# EAGLE board SparkFun_Servo_Trigger_Panel_v10 (EAGLE 6.6.0), part 1 of 3
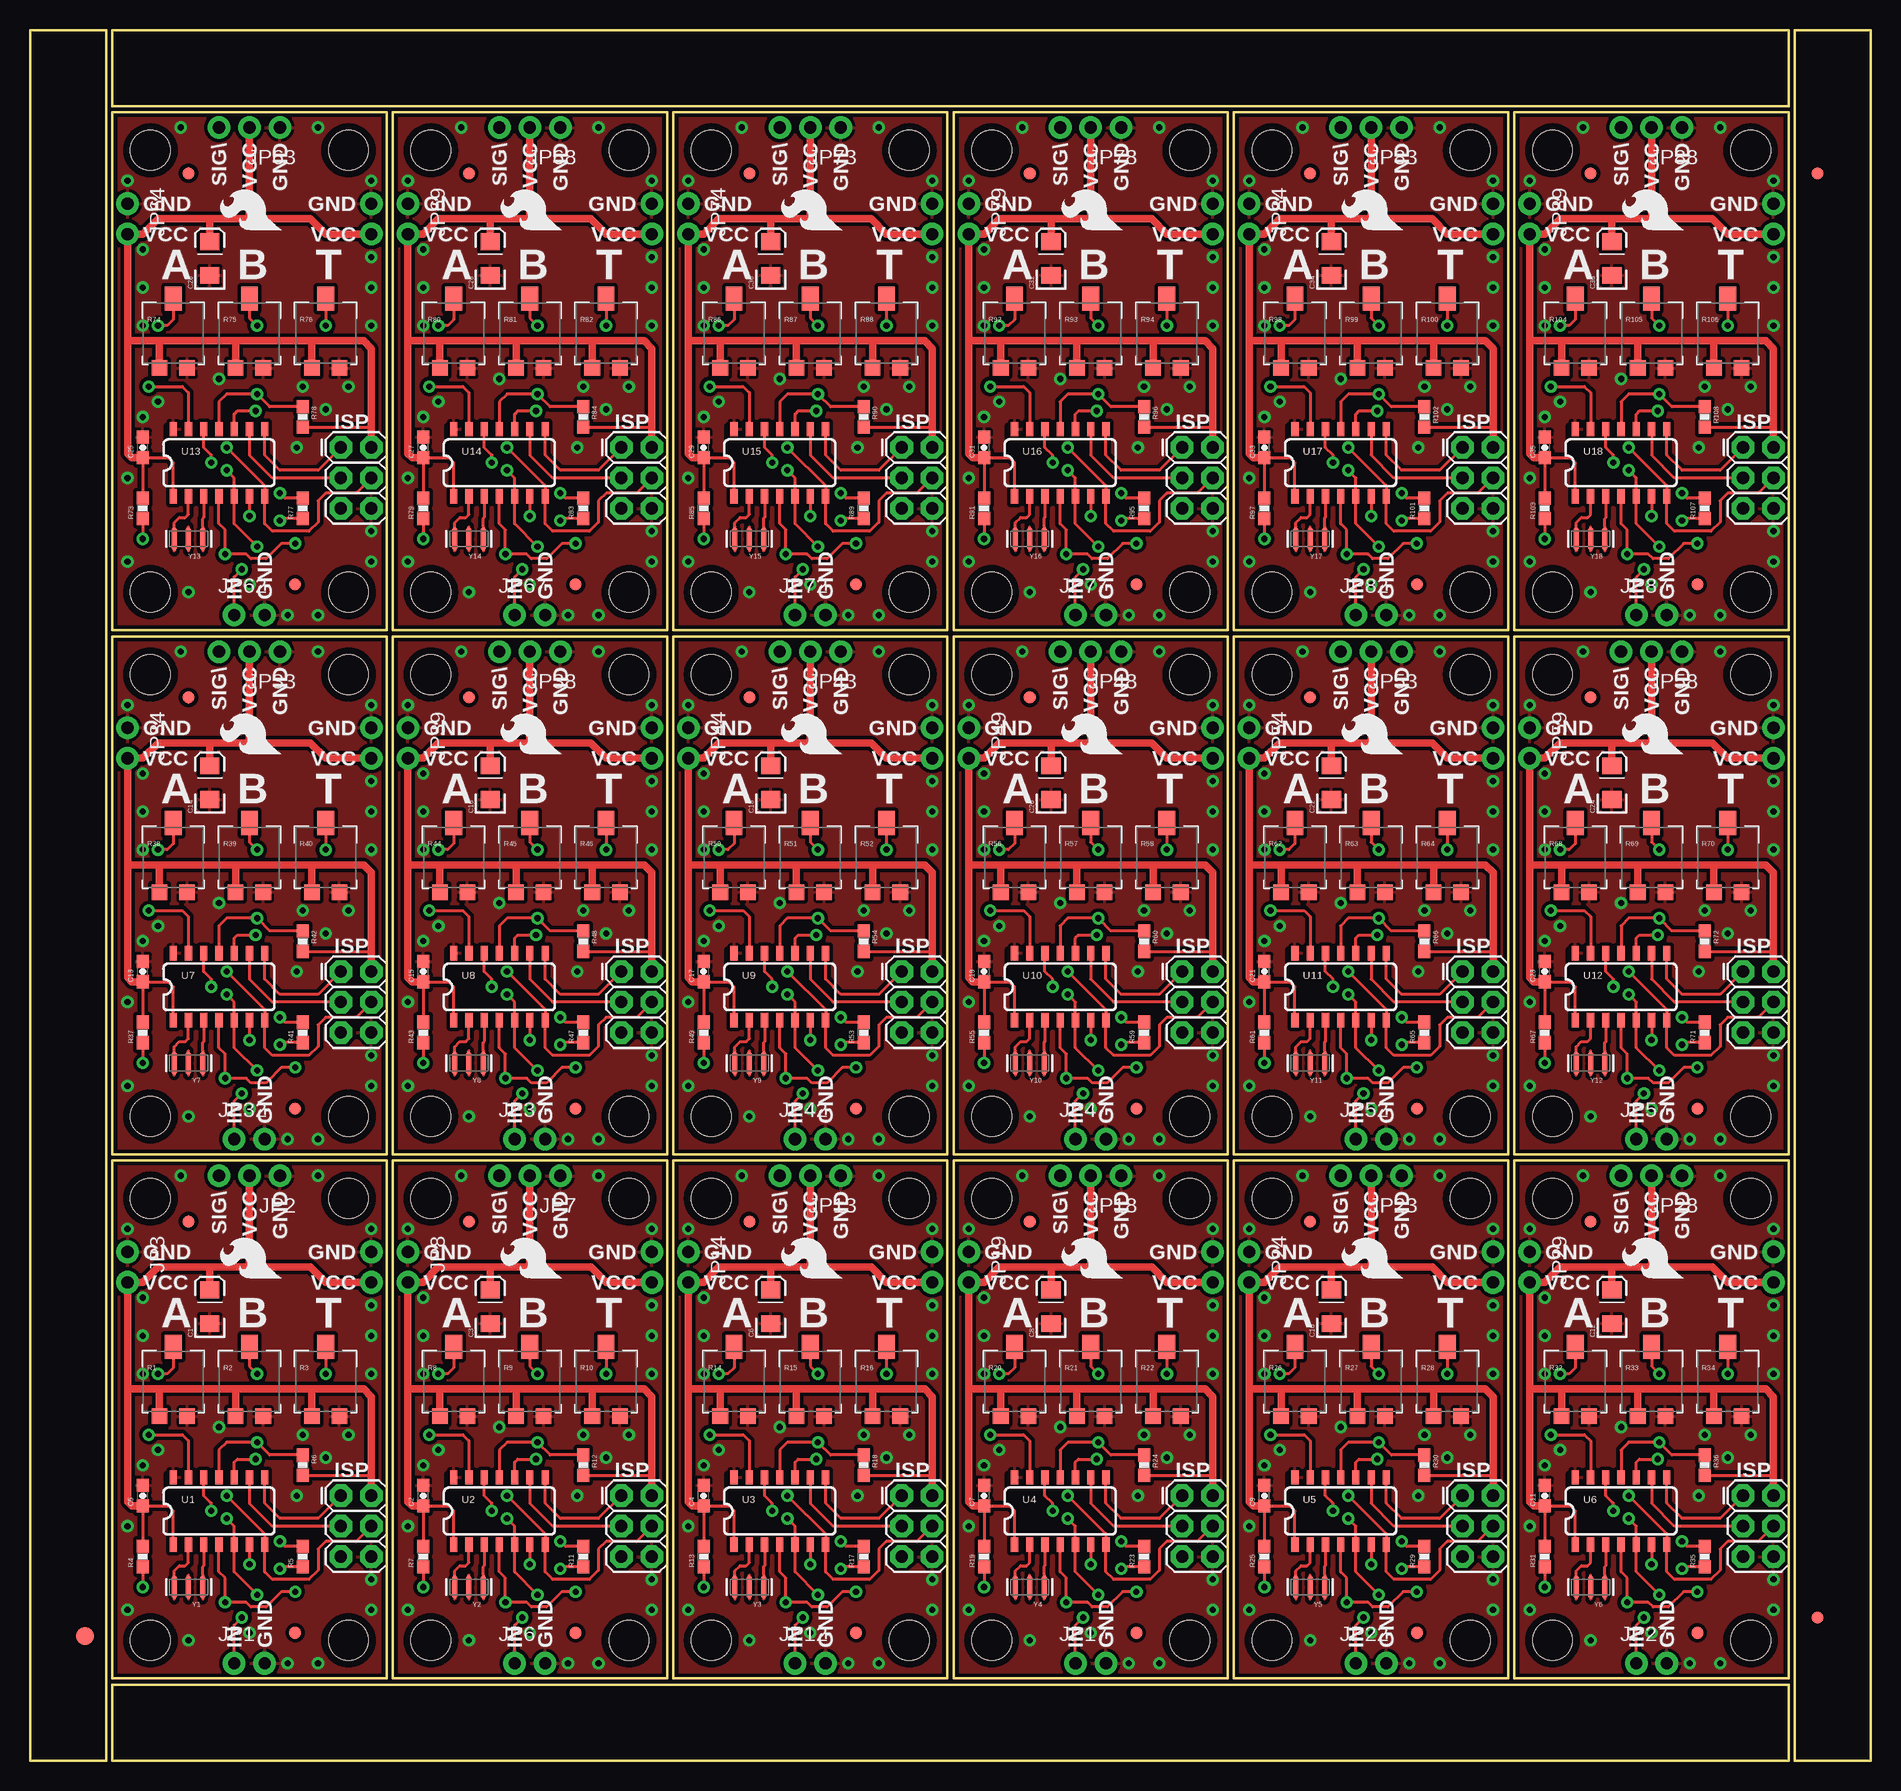
[diagram p0: board, top side]
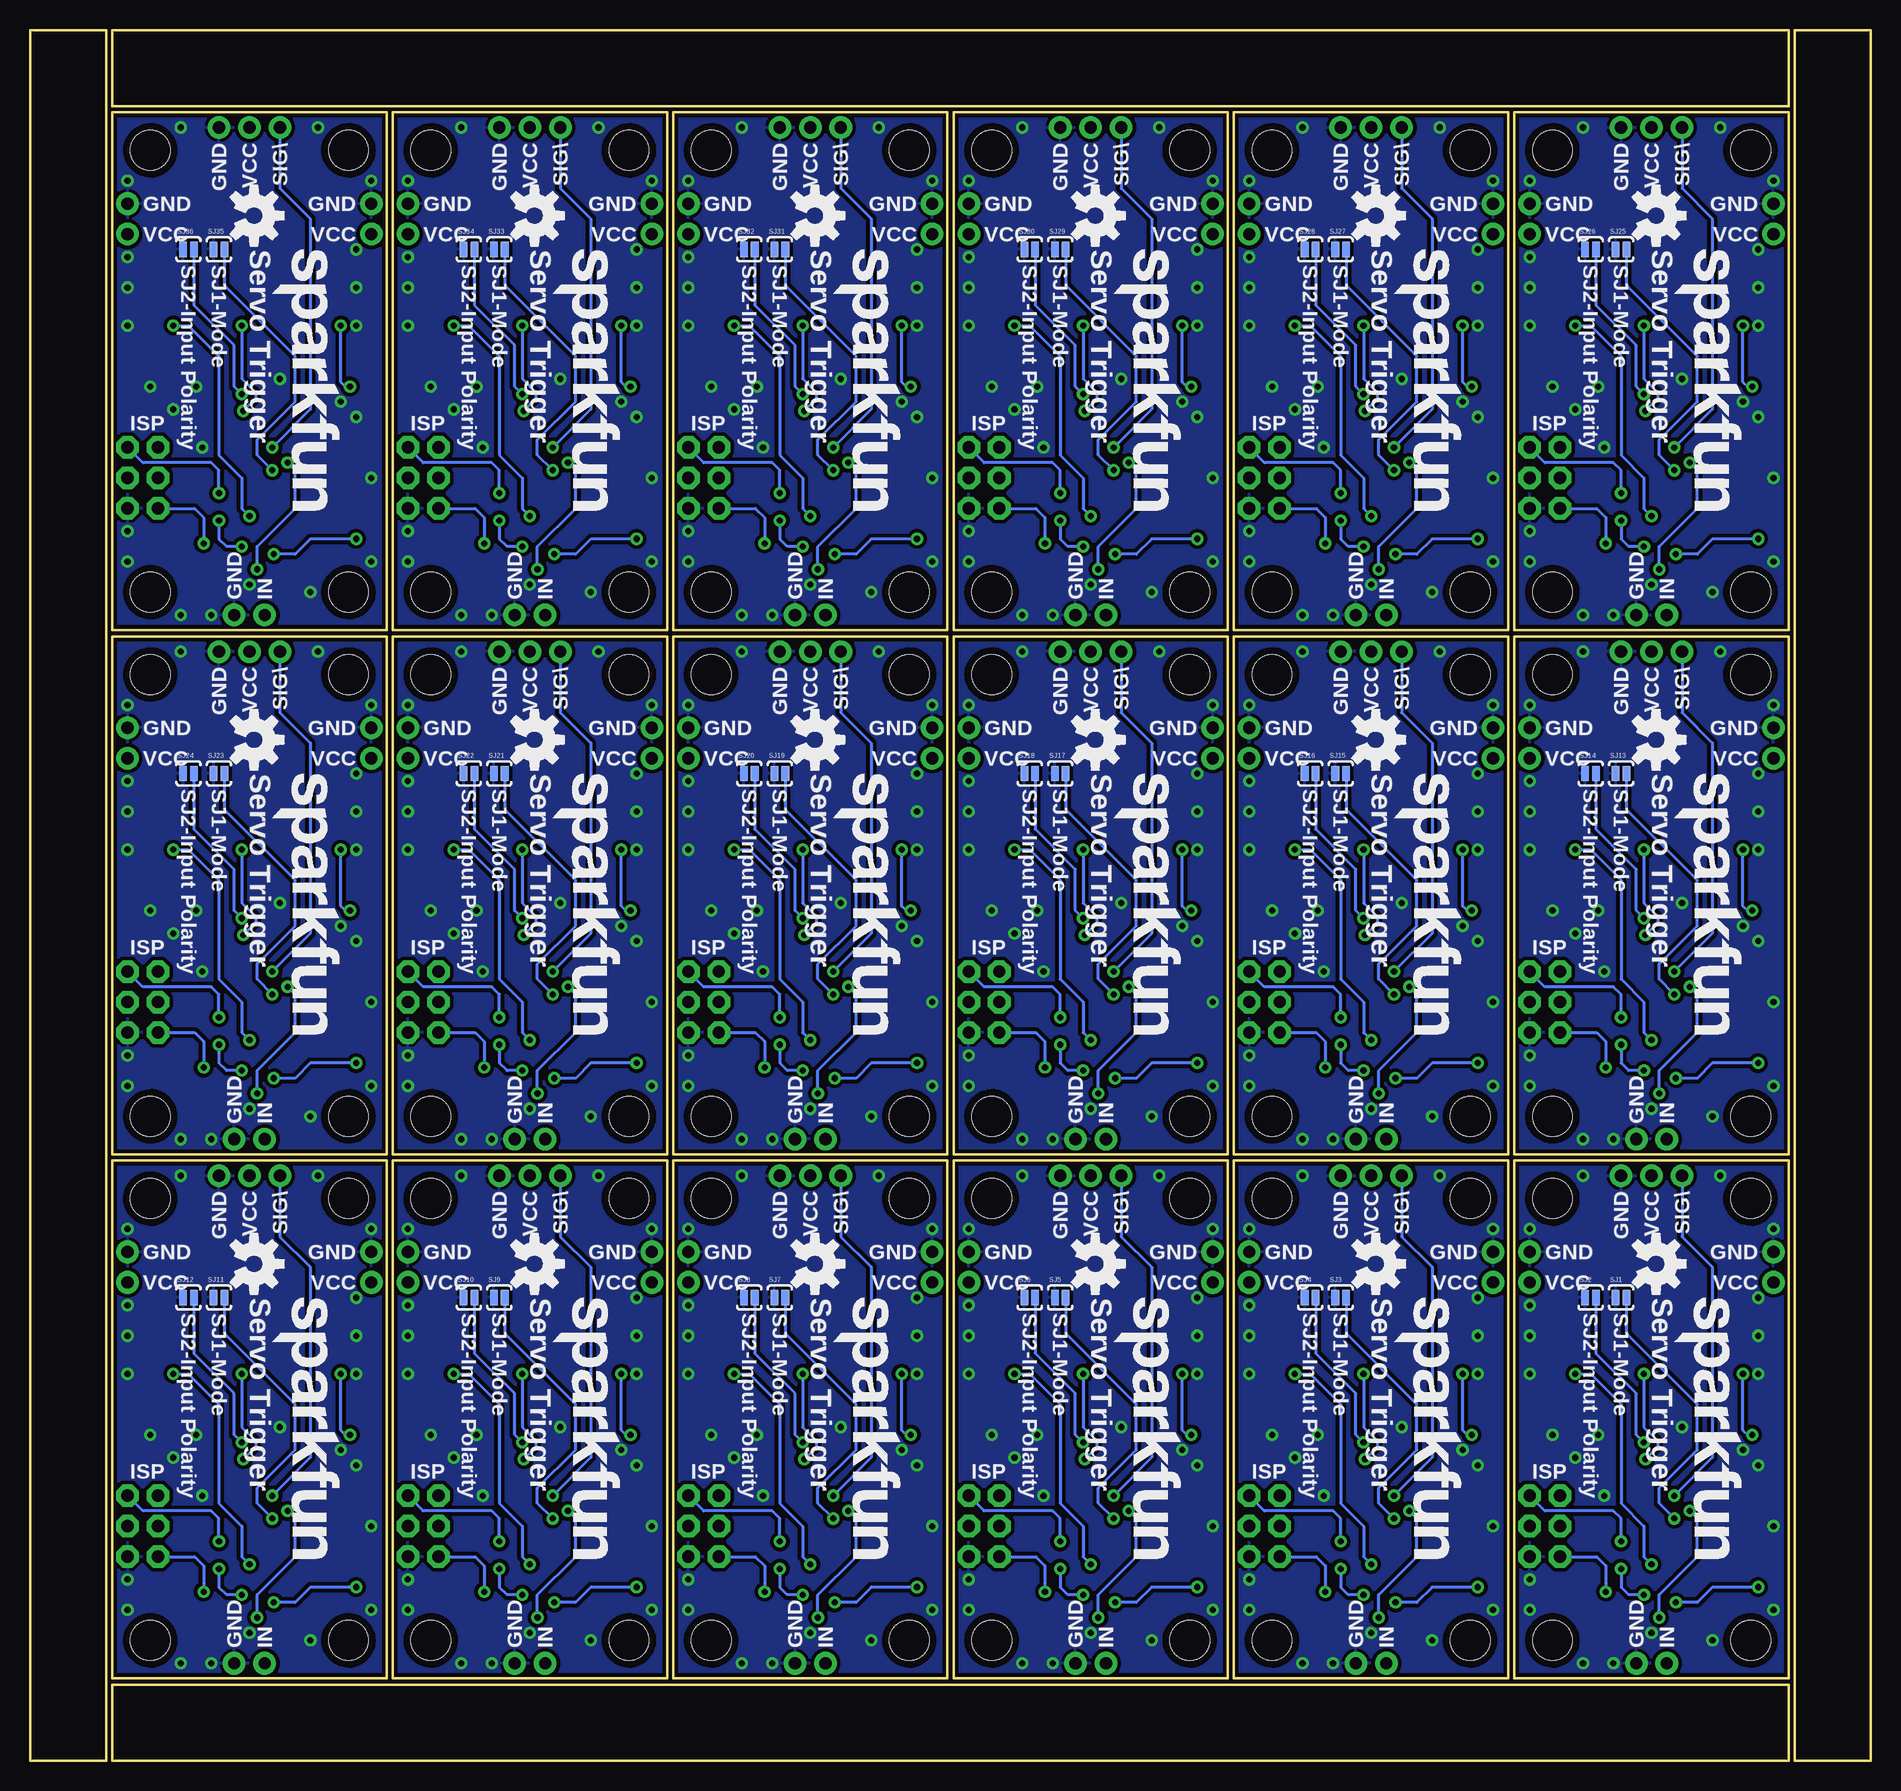
[diagram p1: board, bottom side, seen from below]

Size 153.42 x 144.27 mm. Coordinates in mm from the lower left corner, seen from the top.
Outline: 6.86,6.87 29.72,6.87 29.72,50.04 6.86,50.04 6.86,6.87
Outline: 30.23,6.87 53.09,6.87 53.09,50.04 30.23,50.04 30.23,6.87
Outline: 53.59,6.87 76.45,6.87 76.45,50.04 53.59,50.04 53.59,6.87
Outline: 76.96,6.87 99.82,6.87 99.82,50.04 76.96,50.04 76.96,6.87
Outline: 100.33,6.87 123.19,6.87 123.19,50.04 100.33,50.04 100.33,6.87
Outline: 123.7,6.87 146.56,6.87 146.56,50.04 123.7,50.04 123.7,6.87
Outline: 6.86,50.56 29.72,50.56 29.72,93.73 6.86,93.73 6.86,50.56
Outline: 30.23,50.56 53.09,50.56 53.09,93.73 30.23,93.73 30.23,50.56
Outline: 53.59,50.56 76.45,50.56 76.45,93.73 53.59,93.73 53.59,50.56
Outline: 76.96,50.56 99.82,50.56 99.82,93.73 76.96,93.73 76.96,50.56
Outline: 100.33,50.56 123.19,50.56 123.19,93.73 100.33,93.73 100.33,50.56
Outline: 123.7,50.56 146.56,50.56 146.56,93.73 123.7,93.73 123.7,50.56
Outline: 6.86,94.25 29.72,94.25 29.72,137.41 6.86,137.41 6.86,94.25
Outline: 30.23,94.25 53.09,94.25 53.09,137.41 30.23,137.41 30.23,94.25
Outline: 53.59,94.25 76.45,94.25 76.45,137.41 53.59,137.41 53.59,94.25
Outline: 76.96,94.25 99.82,94.25 99.82,137.41 76.96,137.41 76.96,94.25
Outline: 100.33,94.25 123.19,94.25 123.19,137.41 100.33,137.41 100.33,94.25
Outline: 123.7,94.25 146.56,94.25 146.56,137.41 123.7,137.41 123.7,94.25
Outline: 6.35,0 6.35,144.27 0,144.27 0,0 6.35,0
Outline: 6.86,0 146.56,0 146.56,6.35 6.86,6.35 6.86,0
Outline: 153.42,0 153.42,144.27 147.07,144.27 147.07,0 153.42,0
Outline: 146.56,144.27 6.86,144.27 6.86,137.92 146.56,137.92 146.56,144.27
Copper layers (1*16): Top 0.035mm / dielectric 1.5mm / Bottom 0.035mm
Design rules "SparkFun-2-layer": minimum track width 7mil, minimum drill 15mil, track to track 8mil, track to pad 8mil, pad to pad 8mil, via to via 8mil, smd to smd 8mil, copper to edge 8mil, drill to drill 8mil, minimum pad ring 12mil, minimum via ring 10mil, stop-mask expansion 4mil, vias tented up to drill 20mil, thermal gap 10mil
tRestrict: area 11.4,21.6 to 11.6,23.9; area 11.4,22.7 to 13.6,22.9; area 34.8,21.6 to 34.9,23.9; area 34.8,22.7 to 37,22.9; area 58.2,21.6 to 58.3,23.9; area 58.2,22.7 to 60.3,22.9; area 81.5,21.6 to 81.7,23.9; area 81.5,22.7 to 83.7,22.9; area 104.9,21.6 to 105,23.9; area 104.9,22.7 to 107.1,22.9; area 128.3,21.6 to 128.4,23.9; area 128.3,22.7 to 130.4,22.9; area 11.4,65.3 to 11.6,67.6; area 11.4,66.4 to 13.6,66.5; area 34.8,65.3 to 34.9,67.6; area 34.8,66.4 to 37,66.5; area 58.2,65.3 to 58.3,67.6; area 58.2,66.4 to 60.3,66.5; area 81.5,65.3 to 81.7,67.6; area 81.5,66.4 to 83.7,66.5; area 104.9,65.3 to 105,67.6; area 104.9,66.4 to 107.1,66.5; area 128.3,65.3 to 128.4,67.6; area 128.3,66.4 to 130.4,66.5; area 11.4,109 to 11.6,111.3; area 11.4,110.1 to 13.6,110.2; area 34.8,109 to 34.9,111.3; area 34.8,110.1 to 37,110.2; area 58.2,109 to 58.3,111.3; area 58.2,110.1 to 60.3,110.2; area 81.5,109 to 81.7,111.3; area 81.5,110.1 to 83.7,110.2; area 104.9,109 to 105,111.3; area 104.9,110.1 to 107.1,110.2; area 128.3,109 to 128.4,111.3; area 128.3,110.1 to 130.4,110.2

## Footprints (pad centres in the part's own frame; a part is rotated, then mirrored left to right if it is on the bottom)
EIA3216 = smd 1.4 x 1.6: A 1.4,0; C -1.4,0
0603-CAP = smd 1.1 x 1: 1 -0.85,0; 2 0.85,0
FIDUCIAL-1.5X3 = smd 1.5 x 1.5: 1 0,0
FIDUCIAL-1X2 = smd 1 x 1: 1 0,0
1X02_NO_SILK = drill 1.016 pad 1.88: 1 0,0; 2 2.54,0
1X03_NO_SILK = drill 1.016 pad 1.88: 1 0,0; 2 2.54,0; 3 5.08,0
2X3 = drill 1.016 pad 1.88 octagon: 1 0,0; 2 0,2.54; 3 2.54,0; 4 2.54,2.54; 5 5.08,0; 6 5.08,2.54
TRIMPOT_5MM = smd 1.3 x 1.3: A 1.15,-2.54; C -1.15,-2.54 | smd 1.402 x 2: B 0,3.239
0603-RES = smd 1.1 x 1: 1 -0.85,0; 2 0.85,0
PAD-JUMPER-2-NO_YES_SILK = smd 0.635 x 1.27: 1 -0.45,0; 2 0.45,0
STAND-OFF = hole 3.302: 0,0
PAD.03X.04 = smd 1.016 x 1.016: P$1 0,0
SO14 = smd 0.6 x 1.2: 1 -3.81,-2.8; 2 -2.54,-2.8; 3 -1.27,-2.8; 4 0,-2.8; 5 1.27,-2.8; 6 2.54,-2.8; 7 3.81,-2.8; 8 3.81,2.8; 9 2.54,2.8; 10 1.27,2.8; 11 0,2.8; 12 -1.27,2.8; 13 -2.54,2.8; 14 -3.81,2.8
RESONATOR-SMD = smd 0.45 x 1.905: 1 -1.2,0; 2 0,0; 3 1.2,0

## Placement (x,y rotation side)
C1  10uF  [EIA3216]  14.99,37.85 90 top
C2  0.1uF  [0603-CAP]  32.77,22.1 90 top
C3  10uF  [EIA3216]  38.35,37.85 90 top
C4  0.1uF  [0603-CAP]  56.13,22.1 90 top
C5  0.1uF  [0603-CAP]  9.4,22.1 90 top
C6  10uF  [EIA3216]  61.72,37.85 90 top
C7  0.1uF  [0603-CAP]  79.5,22.1 90 top
C8  10uF  [EIA3216]  85.09,37.85 90 top
C9  0.1uF  [0603-CAP]  102.87,22.1 90 top
C10  10uF  [EIA3216]  108.46,37.85 90 top
C11  0.1uF  [0603-CAP]  126.24,22.1 90 top
C12  10uF  [EIA3216]  131.83,37.85 90 top
C13  0.1uF  [0603-CAP]  9.4,65.79 90 top
C14  10uF  [EIA3216]  14.99,81.53 90 top
C15  0.1uF  [0603-CAP]  32.77,65.79 90 top
C16  10uF  [EIA3216]  38.35,81.53 90 top
C17  0.1uF  [0603-CAP]  56.13,65.79 90 top
C18  10uF  [EIA3216]  61.72,81.53 90 top
C19  0.1uF  [0603-CAP]  79.5,65.79 90 top
C20  10uF  [EIA3216]  85.09,81.53 90 top
C21  0.1uF  [0603-CAP]  102.87,65.79 90 top
C22  10uF  [EIA3216]  108.46,81.53 90 top
C23  0.1uF  [0603-CAP]  126.24,65.79 90 top
C24  10uF  [EIA3216]  131.83,81.53 90 top
C25  0.1uF  [0603-CAP]  9.4,109.47 90 top
C26  10uF  [EIA3216]  14.99,125.22 90 top
C27  0.1uF  [0603-CAP]  32.77,109.47 90 top
C28  10uF  [EIA3216]  38.35,125.22 90 top
C29  0.1uF  [0603-CAP]  56.13,109.47 90 top
C30  10uF  [EIA3216]  61.72,125.22 90 top
C31  0.1uF  [0603-CAP]  79.5,109.47 90 top
C32  10uF  [EIA3216]  85.09,125.22 90 top
C33  0.1uF  [0603-CAP]  102.87,109.47 90 top
C34  10uF  [EIA3216]  108.46,125.22 90 top
C35  0.1uF  [0603-CAP]  126.24,109.47 90 top
C36  10uF  [EIA3216]  131.83,125.22 90 top
E$1  [FIDUCIAL-1.5X3]  4.57,10.41 0 top
E$4  [FIDUCIAL-1X2]  148.97,11.94 0 top
E$5  [FIDUCIAL-1X2]  148.97,132.33 180 top
FID1  FIDUCIAL1X2  [FIDUCIAL-1X2]  13.21,44.96 0 top
FID2  FIDUCIAL1X2  [FIDUCIAL-1X2]  22.1,10.67 0 top
FID3  FIDUCIAL1X2  [FIDUCIAL-1X2]  36.58,44.96 0 top
FID4  FIDUCIAL1X2  [FIDUCIAL-1X2]  45.47,10.67 0 top
FID5  FIDUCIAL1X2  [FIDUCIAL-1X2]  59.94,44.96 0 top
FID6  FIDUCIAL1X2  [FIDUCIAL-1X2]  68.83,10.67 0 top
FID7  FIDUCIAL1X2  [FIDUCIAL-1X2]  83.31,44.96 0 top
FID8  FIDUCIAL1X2  [FIDUCIAL-1X2]  92.2,10.67 0 top
FID9  FIDUCIAL1X2  [FIDUCIAL-1X2]  106.68,44.96 0 top
FID10  FIDUCIAL1X2  [FIDUCIAL-1X2]  115.57,10.67 0 top
FID11  FIDUCIAL1X2  [FIDUCIAL-1X2]  130.05,44.96 0 top
FID12  FIDUCIAL1X2  [FIDUCIAL-1X2]  138.94,10.67 0 top
FID13  FIDUCIAL1X2  [FIDUCIAL-1X2]  13.21,88.65 0 top
FID14  FIDUCIAL1X2  [FIDUCIAL-1X2]  22.1,54.36 0 top
FID15  FIDUCIAL1X2  [FIDUCIAL-1X2]  36.58,88.65 0 top
FID16  FIDUCIAL1X2  [FIDUCIAL-1X2]  45.47,54.36 0 top
FID17  FIDUCIAL1X2  [FIDUCIAL-1X2]  59.94,88.65 0 top
FID18  FIDUCIAL1X2  [FIDUCIAL-1X2]  68.83,54.36 0 top
FID19  FIDUCIAL1X2  [FIDUCIAL-1X2]  83.31,88.65 0 top
FID20  FIDUCIAL1X2  [FIDUCIAL-1X2]  92.2,54.36 0 top
FID21  FIDUCIAL1X2  [FIDUCIAL-1X2]  106.68,88.65 0 top
FID22  FIDUCIAL1X2  [FIDUCIAL-1X2]  115.57,54.36 0 top
FID23  FIDUCIAL1X2  [FIDUCIAL-1X2]  130.05,88.65 0 top
FID24  FIDUCIAL1X2  [FIDUCIAL-1X2]  138.94,54.36 0 top
FID25  FIDUCIAL1X2  [FIDUCIAL-1X2]  13.21,132.33 0 top
FID26  FIDUCIAL1X2  [FIDUCIAL-1X2]  22.1,98.04 0 top
FID27  FIDUCIAL1X2  [FIDUCIAL-1X2]  36.58,132.33 0 top
FID28  FIDUCIAL1X2  [FIDUCIAL-1X2]  45.47,98.04 0 top
FID29  FIDUCIAL1X2  [FIDUCIAL-1X2]  59.94,132.33 0 top
FID30  FIDUCIAL1X2  [FIDUCIAL-1X2]  68.83,98.04 0 top
FID31  FIDUCIAL1X2  [FIDUCIAL-1X2]  83.31,132.33 0 top
FID32  FIDUCIAL1X2  [FIDUCIAL-1X2]  92.2,98.04 0 top
FID33  FIDUCIAL1X2  [FIDUCIAL-1X2]  106.68,132.33 0 top
FID34  FIDUCIAL1X2  [FIDUCIAL-1X2]  115.57,98.04 0 top
FID35  FIDUCIAL1X2  [FIDUCIAL-1X2]  130.05,132.33 0 top
FID36  FIDUCIAL1X2  [FIDUCIAL-1X2]  138.94,98.04 0 top
JP1  M021X02_NO_SILK  [1X02_NO_SILK]  17.02,8.13 0 top
JP2  SERVO-OUT  [1X03_NO_SILK]  20.83,48.77 180 top
JP3  M021X02_NO_SILK  [1X02_NO_SILK]  8.13,42.42 270 top
JP4  M021X02_NO_SILK  [1X02_NO_SILK]  28.45,42.42 270 top
JP5  [2X3]  49.28,22.1 270 top
JP6  M021X02_NO_SILK  [1X02_NO_SILK]  40.39,8.13 0 top
JP7  SERVO-OUT  [1X03_NO_SILK]  44.2,48.77 180 top
JP8  M021X02_NO_SILK  [1X02_NO_SILK]  31.5,42.42 270 top
JP9  [2X3]  25.91,22.1 270 top
JP10  M021X02_NO_SILK  [1X02_NO_SILK]  51.82,42.42 270 top
JP11  [2X3]  72.64,22.1 270 top
JP12  M021X02_NO_SILK  [1X02_NO_SILK]  63.75,8.13 0 top
JP13  SERVO-OUT  [1X03_NO_SILK]  67.56,48.77 180 top
JP14  M021X02_NO_SILK  [1X02_NO_SILK]  54.86,42.42 270 top
JP15  M021X02_NO_SILK  [1X02_NO_SILK]  75.18,42.42 270 top
JP16  [2X3]  96.01,22.1 270 top
JP17  M021X02_NO_SILK  [1X02_NO_SILK]  87.12,8.13 0 top
JP18  SERVO-OUT  [1X03_NO_SILK]  90.93,48.77 180 top
JP19  M021X02_NO_SILK  [1X02_NO_SILK]  78.23,42.42 270 top
JP20  M021X02_NO_SILK  [1X02_NO_SILK]  98.55,42.42 270 top
JP21  [2X3]  119.38,22.1 270 top
JP22  M021X02_NO_SILK  [1X02_NO_SILK]  110.49,8.13 0 top
JP23  SERVO-OUT  [1X03_NO_SILK]  114.3,48.77 180 top
JP24  M021X02_NO_SILK  [1X02_NO_SILK]  101.6,42.42 270 top
JP25  M021X02_NO_SILK  [1X02_NO_SILK]  121.92,42.42 270 top
JP26  [2X3]  142.75,22.1 270 top
JP27  M021X02_NO_SILK  [1X02_NO_SILK]  133.86,8.13 0 top
JP28  SERVO-OUT  [1X03_NO_SILK]  137.67,48.77 180 top
JP29  M021X02_NO_SILK  [1X02_NO_SILK]  124.97,42.42 270 top
JP30  M021X02_NO_SILK  [1X02_NO_SILK]  145.29,42.42 270 top
JP31  [2X3]  25.91,65.79 270 top
JP32  M021X02_NO_SILK  [1X02_NO_SILK]  17.02,51.82 0 top
JP33  SERVO-OUT  [1X03_NO_SILK]  20.83,92.46 180 top
JP34  M021X02_NO_SILK  [1X02_NO_SILK]  8.13,86.11 270 top
JP35  M021X02_NO_SILK  [1X02_NO_SILK]  28.45,86.11 270 top
JP36  [2X3]  49.28,65.79 270 top
JP37  M021X02_NO_SILK  [1X02_NO_SILK]  40.39,51.82 0 top
JP38  SERVO-OUT  [1X03_NO_SILK]  44.2,92.46 180 top
JP39  M021X02_NO_SILK  [1X02_NO_SILK]  31.5,86.11 270 top
JP40  M021X02_NO_SILK  [1X02_NO_SILK]  51.82,86.11 270 top
JP41  [2X3]  72.64,65.79 270 top
JP42  M021X02_NO_SILK  [1X02_NO_SILK]  63.75,51.82 0 top
JP43  SERVO-OUT  [1X03_NO_SILK]  67.56,92.46 180 top
JP44  M021X02_NO_SILK  [1X02_NO_SILK]  54.86,86.11 270 top
JP45  M021X02_NO_SILK  [1X02_NO_SILK]  75.18,86.11 270 top
JP46  [2X3]  96.01,65.79 270 top
JP47  M021X02_NO_SILK  [1X02_NO_SILK]  87.12,51.82 0 top
JP48  SERVO-OUT  [1X03_NO_SILK]  90.93,92.46 180 top
JP49  M021X02_NO_SILK  [1X02_NO_SILK]  78.23,86.11 270 top
JP50  M021X02_NO_SILK  [1X02_NO_SILK]  98.55,86.11 270 top
JP51  [2X3]  119.38,65.79 270 top
JP52  M021X02_NO_SILK  [1X02_NO_SILK]  110.49,51.82 0 top
JP53  SERVO-OUT  [1X03_NO_SILK]  114.3,92.46 180 top
JP54  M021X02_NO_SILK  [1X02_NO_SILK]  101.6,86.11 270 top
JP55  M021X02_NO_SILK  [1X02_NO_SILK]  121.92,86.11 270 top
JP56  [2X3]  142.75,65.79 270 top
JP57  M021X02_NO_SILK  [1X02_NO_SILK]  133.86,51.82 0 top
JP58  SERVO-OUT  [1X03_NO_SILK]  137.67,92.46 180 top
JP59  M021X02_NO_SILK  [1X02_NO_SILK]  124.97,86.11 270 top
JP60  M021X02_NO_SILK  [1X02_NO_SILK]  145.29,86.11 270 top
JP61  [2X3]  25.91,109.47 270 top
JP62  M021X02_NO_SILK  [1X02_NO_SILK]  17.02,95.5 0 top
JP63  SERVO-OUT  [1X03_NO_SILK]  20.83,136.14 180 top
JP64  M021X02_NO_SILK  [1X02_NO_SILK]  8.13,129.79 270 top
JP65  M021X02_NO_SILK  [1X02_NO_SILK]  28.45,129.79 270 top
JP66  [2X3]  49.28,109.47 270 top
JP67  M021X02_NO_SILK  [1X02_NO_SILK]  40.39,95.5 0 top
JP68  SERVO-OUT  [1X03_NO_SILK]  44.2,136.14 180 top
JP69  M021X02_NO_SILK  [1X02_NO_SILK]  31.5,129.79 270 top
JP70  M021X02_NO_SILK  [1X02_NO_SILK]  51.82,129.79 270 top
JP71  [2X3]  72.64,109.47 270 top
JP72  M021X02_NO_SILK  [1X02_NO_SILK]  63.75,95.5 0 top
JP73  SERVO-OUT  [1X03_NO_SILK]  67.56,136.14 180 top
JP74  M021X02_NO_SILK  [1X02_NO_SILK]  54.86,129.79 270 top
JP75  M021X02_NO_SILK  [1X02_NO_SILK]  75.18,129.79 270 top
JP76  [2X3]  96.01,109.47 270 top
JP77  M021X02_NO_SILK  [1X02_NO_SILK]  87.12,95.5 0 top
JP78  SERVO-OUT  [1X03_NO_SILK]  90.93,136.14 180 top
JP79  M021X02_NO_SILK  [1X02_NO_SILK]  78.23,129.79 270 top
JP80  M021X02_NO_SILK  [1X02_NO_SILK]  98.55,129.79 270 top
JP81  [2X3]  119.38,109.47 270 top
JP82  M021X02_NO_SILK  [1X02_NO_SILK]  110.49,95.5 0 top
JP83  SERVO-OUT  [1X03_NO_SILK]  114.3,136.14 180 top
JP84  M021X02_NO_SILK  [1X02_NO_SILK]  101.6,129.79 270 top
JP85  M021X02_NO_SILK  [1X02_NO_SILK]  121.92,129.79 270 top
JP86  [2X3]  142.75,109.47 270 top
JP87  M021X02_NO_SILK  [1X02_NO_SILK]  133.86,95.5 0 top
JP88  SERVO-OUT  [1X03_NO_SILK]  137.67,136.14 180 top
JP89  M021X02_NO_SILK  [1X02_NO_SILK]  124.97,129.79 270 top
JP90  M021X02_NO_SILK  [1X02_NO_SILK]  145.29,129.79 270 top
LOGO1  OSHW-LOGOM  [OSHW-LOGO-M]  17.91,41.42 270 bottom
LOGO2  SFE_LOGO_NAME.2_INCH  [SFE_LOGO_NAME_.2]  16.38,38.61 270 bottom
LOGO3  SFE_LOGO_FLAME.2_INCH  [SFE_LOGO_FLAME_.2]  21.21,39.88 90 top
LOGO4  OSHW-LOGOM  [OSHW-LOGO-M]  41.27,41.42 270 bottom
LOGO5  SFE_LOGO_NAME.2_INCH  [SFE_LOGO_NAME_.2]  39.75,38.61 270 bottom
LOGO6  SFE_LOGO_FLAME.2_INCH  [SFE_LOGO_FLAME_.2]  44.58,39.88 90 top
LOGO7  OSHW-LOGOM  [OSHW-LOGO-M]  64.64,41.42 270 bottom
LOGO8  SFE_LOGO_NAME.2_INCH  [SFE_LOGO_NAME_.2]  63.12,38.61 270 bottom
LOGO9  SFE_LOGO_FLAME.2_INCH  [SFE_LOGO_FLAME_.2]  67.94,39.88 90 top
LOGO10  OSHW-LOGOM  [OSHW-LOGO-M]  88.01,41.42 270 bottom
LOGO11  SFE_LOGO_NAME.2_INCH  [SFE_LOGO_NAME_.2]  86.49,38.61 270 bottom
LOGO12  SFE_LOGO_FLAME.2_INCH  [SFE_LOGO_FLAME_.2]  91.31,39.88 90 top
LOGO13  OSHW-LOGOM  [OSHW-LOGO-M]  111.38,41.42 270 bottom
LOGO14  SFE_LOGO_NAME.2_INCH  [SFE_LOGO_NAME_.2]  109.86,38.61 270 bottom
LOGO15  SFE_LOGO_FLAME.2_INCH  [SFE_LOGO_FLAME_.2]  114.68,39.88 90 top
LOGO16  OSHW-LOGOM  [OSHW-LOGO-M]  134.75,41.42 270 bottom
LOGO17  SFE_LOGO_NAME.2_INCH  [SFE_LOGO_NAME_.2]  133.22,38.61 270 bottom
LOGO18  SFE_LOGO_FLAME.2_INCH  [SFE_LOGO_FLAME_.2]  138.05,39.88 90 top
LOGO19  OSHW-LOGOM  [OSHW-LOGO-M]  17.91,85.11 270 bottom
LOGO20  SFE_LOGO_NAME.2_INCH  [SFE_LOGO_NAME_.2]  16.38,82.3 270 bottom
LOGO21  SFE_LOGO_FLAME.2_INCH  [SFE_LOGO_FLAME_.2]  21.21,83.57 90 top
LOGO22  OSHW-LOGOM  [OSHW-LOGO-M]  41.27,85.11 270 bottom
LOGO23  SFE_LOGO_NAME.2_INCH  [SFE_LOGO_NAME_.2]  39.75,82.3 270 bottom
LOGO24  SFE_LOGO_FLAME.2_INCH  [SFE_LOGO_FLAME_.2]  44.58,83.57 90 top
LOGO25  OSHW-LOGOM  [OSHW-LOGO-M]  64.64,85.11 270 bottom
LOGO26  SFE_LOGO_NAME.2_INCH  [SFE_LOGO_NAME_.2]  63.12,82.3 270 bottom
LOGO27  SFE_LOGO_FLAME.2_INCH  [SFE_LOGO_FLAME_.2]  67.94,83.57 90 top
LOGO28  OSHW-LOGOM  [OSHW-LOGO-M]  88.01,85.11 270 bottom
LOGO29  SFE_LOGO_NAME.2_INCH  [SFE_LOGO_NAME_.2]  86.49,82.3 270 bottom
LOGO30  SFE_LOGO_FLAME.2_INCH  [SFE_LOGO_FLAME_.2]  91.31,83.57 90 top
LOGO31  OSHW-LOGOM  [OSHW-LOGO-M]  111.38,85.11 270 bottom
LOGO32  SFE_LOGO_NAME.2_INCH  [SFE_LOGO_NAME_.2]  109.86,82.3 270 bottom
LOGO33  SFE_LOGO_FLAME.2_INCH  [SFE_LOGO_FLAME_.2]  114.68,83.57 90 top
LOGO34  OSHW-LOGOM  [OSHW-LOGO-M]  134.75,85.11 270 bottom
LOGO35  SFE_LOGO_NAME.2_INCH  [SFE_LOGO_NAME_.2]  133.22,82.3 270 bottom
LOGO36  SFE_LOGO_FLAME.2_INCH  [SFE_LOGO_FLAME_.2]  138.05,83.57 90 top
LOGO37  OSHW-LOGOM  [OSHW-LOGO-M]  17.91,128.79 270 bottom
LOGO38  SFE_LOGO_NAME.2_INCH  [SFE_LOGO_NAME_.2]  16.38,125.98 270 bottom
LOGO39  SFE_LOGO_FLAME.2_INCH  [SFE_LOGO_FLAME_.2]  21.21,127.25 90 top
LOGO40  OSHW-LOGOM  [OSHW-LOGO-M]  41.27,128.79 270 bottom
LOGO41  SFE_LOGO_NAME.2_INCH  [SFE_LOGO_NAME_.2]  39.75,125.98 270 bottom
LOGO42  SFE_LOGO_FLAME.2_INCH  [SFE_LOGO_FLAME_.2]  44.58,127.25 90 top
LOGO43  OSHW-LOGOM  [OSHW-LOGO-M]  64.64,128.79 270 bottom
LOGO44  SFE_LOGO_NAME.2_INCH  [SFE_LOGO_NAME_.2]  63.12,125.98 270 bottom
LOGO45  SFE_LOGO_FLAME.2_INCH  [SFE_LOGO_FLAME_.2]  67.94,127.25 90 top
LOGO46  OSHW-LOGOM  [OSHW-LOGO-M]  88.01,128.79 270 bottom
LOGO47  SFE_LOGO_NAME.2_INCH  [SFE_LOGO_NAME_.2]  86.49,125.98 270 bottom
LOGO48  SFE_LOGO_FLAME.2_INCH  [SFE_LOGO_FLAME_.2]  91.31,127.25 90 top
LOGO49  OSHW-LOGOM  [OSHW-LOGO-M]  111.38,128.79 270 bottom
LOGO50  SFE_LOGO_NAME.2_INCH  [SFE_LOGO_NAME_.2]  109.86,125.98 270 bottom
LOGO51  SFE_LOGO_FLAME.2_INCH  [SFE_LOGO_FLAME_.2]  114.68,127.25 90 top
LOGO52  OSHW-LOGOM  [OSHW-LOGO-M]  134.75,128.79 270 bottom
LOGO53  SFE_LOGO_NAME.2_INCH  [SFE_LOGO_NAME_.2]  133.22,125.98 270 bottom
LOGO54  SFE_LOGO_FLAME.2_INCH  [SFE_LOGO_FLAME_.2]  138.05,127.25 90 top
R1  10k  [TRIMPOT_5MM]  11.94,31.26 0 top
R2  10k  [TRIMPOT_5MM]  18.29,31.26 0 top
R3  10k  [TRIMPOT_5MM]  24.64,31.26 0 top
R4  10K  [0603-RES]  9.4,17.02 90 top
R5  10K  [0603-RES]  22.73,17.02 90 top
R6  10K  [0603-RES]  22.73,24.64 270 top
R7  10K  [0603-RES]  32.77,17.02 90 top
R8  10k  [TRIMPOT_5MM]  35.31,31.26 0 top
R9  10k  [TRIMPOT_5MM]  41.66,31.26 0 top
R10  10k  [TRIMPOT_5MM]  48.01,31.26 0 top
R11  10K  [0603-RES]  46.1,17.02 90 top
R12  10K  [0603-RES]  46.1,24.64 270 top
R13  10K  [0603-RES]  56.13,17.02 90 top
R14  10k  [TRIMPOT_5MM]  58.67,31.26 0 top
R15  10k  [TRIMPOT_5MM]  65.02,31.26 0 top
R16  10k  [TRIMPOT_5MM]  71.37,31.26 0 top
R17  10K  [0603-RES]  69.47,17.02 90 top
R18  10K  [0603-RES]  69.47,24.64 270 top
R19  10K  [0603-RES]  79.5,17.02 90 top
R20  10k  [TRIMPOT_5MM]  82.04,31.26 0 top
R21  10k  [TRIMPOT_5MM]  88.39,31.26 0 top
R22  10k  [TRIMPOT_5MM]  94.74,31.26 0 top
R23  10K  [0603-RES]  92.84,17.02 90 top
R24  10K  [0603-RES]  92.84,24.64 270 top
R25  10K  [0603-RES]  102.87,17.02 90 top
R26  10k  [TRIMPOT_5MM]  105.41,31.26 0 top
R27  10k  [TRIMPOT_5MM]  111.76,31.26 0 top
R28  10k  [TRIMPOT_5MM]  118.11,31.26 0 top
R29  10K  [0603-RES]  116.2,17.02 90 top
R30  10K  [0603-RES]  116.2,24.64 270 top
R31  10K  [0603-RES]  126.24,17.02 90 top
R32  10k  [TRIMPOT_5MM]  128.78,31.26 0 top
R33  10k  [TRIMPOT_5MM]  135.13,31.26 0 top
R34  10k  [TRIMPOT_5MM]  141.48,31.26 0 top
R35  10K  [0603-RES]  139.57,17.02 90 top
R36  10K  [0603-RES]  139.57,24.64 270 top
R37  10K  [0603-RES]  9.4,60.71 90 top
R38  10k  [TRIMPOT_5MM]  11.94,74.95 0 top
R39  10k  [TRIMPOT_5MM]  18.29,74.95 0 top
R40  10k  [TRIMPOT_5MM]  24.64,74.95 0 top
R41  10K  [0603-RES]  22.73,60.71 90 top
R42  10K  [0603-RES]  22.73,68.33 270 top
R43  10K  [0603-RES]  32.77,60.71 90 top
R44  10k  [TRIMPOT_5MM]  35.31,74.95 0 top
R45  10k  [TRIMPOT_5MM]  41.66,74.95 0 top
R46  10k  [TRIMPOT_5MM]  48.01,74.95 0 top
R47  10K  [0603-RES]  46.1,60.71 90 top
R48  10K  [0603-RES]  46.1,68.33 270 top
R49  10K  [0603-RES]  56.13,60.71 90 top
R50  10k  [TRIMPOT_5MM]  58.67,74.95 0 top
R51  10k  [TRIMPOT_5MM]  65.02,74.95 0 top
R52  10k  [TRIMPOT_5MM]  71.37,74.95 0 top
R53  10K  [0603-RES]  69.47,60.71 90 top
R54  10K  [0603-RES]  69.47,68.33 270 top
R55  10K  [0603-RES]  79.5,60.71 90 top
R56  10k  [TRIMPOT_5MM]  82.04,74.95 0 top
R57  10k  [TRIMPOT_5MM]  88.39,74.95 0 top
R58  10k  [TRIMPOT_5MM]  94.74,74.95 0 top
R59  10K  [0603-RES]  92.84,60.71 90 top
R60  10K  [0603-RES]  92.84,68.33 270 top
R61  10K  [0603-RES]  102.87,60.71 90 top
R62  10k  [TRIMPOT_5MM]  105.41,74.95 0 top
R63  10k  [TRIMPOT_5MM]  111.76,74.95 0 top
R64  10k  [TRIMPOT_5MM]  118.11,74.95 0 top
R65  10K  [0603-RES]  116.2,60.71 90 top
R66  10K  [0603-RES]  116.2,68.33 270 top
R67  10K  [0603-RES]  126.24,60.71 90 top
R68  10k  [TRIMPOT_5MM]  128.78,74.95 0 top
R69  10k  [TRIMPOT_5MM]  135.13,74.95 0 top
R70  10k  [TRIMPOT_5MM]  141.48,74.95 0 top
R71  10K  [0603-RES]  139.57,60.71 90 top
R72  10K  [0603-RES]  139.57,68.33 270 top
R73  10K  [0603-RES]  9.4,104.39 90 top
R74  10k  [TRIMPOT_5MM]  11.94,118.63 0 top
R75  10k  [TRIMPOT_5MM]  18.29,118.63 0 top
R76  10k  [TRIMPOT_5MM]  24.64,118.63 0 top
R77  10K  [0603-RES]  22.73,104.39 90 top
R78  10K  [0603-RES]  22.73,112.01 270 top
R79  10K  [0603-RES]  32.77,104.39 90 top
R80  10k  [TRIMPOT_5MM]  35.31,118.63 0 top
R81  10k  [TRIMPOT_5MM]  41.66,118.63 0 top
R82  10k  [TRIMPOT_5MM]  48.01,118.63 0 top
R83  10K  [0603-RES]  46.1,104.39 90 top
R84  10K  [0603-RES]  46.1,112.01 270 top
R85  10K  [0603-RES]  56.13,104.39 90 top
R86  10k  [TRIMPOT_5MM]  58.67,118.63 0 top
R87  10k  [TRIMPOT_5MM]  65.02,118.63 0 top
R88  10k  [TRIMPOT_5MM]  71.37,118.63 0 top
R89  10K  [0603-RES]  69.47,104.39 90 top
R90  10K  [0603-RES]  69.47,112.01 270 top
R91  10K  [0603-RES]  79.5,104.39 90 top
R92  10k  [TRIMPOT_5MM]  82.04,118.63 0 top
R93  10k  [TRIMPOT_5MM]  88.39,118.63 0 top
R94  10k  [TRIMPOT_5MM]  94.74,118.63 0 top
R95  10K  [0603-RES]  92.84,104.39 90 top
R96  10K  [0603-RES]  92.84,112.01 270 top
R97  10K  [0603-RES]  102.87,104.39 90 top
R98  10k  [TRIMPOT_5MM]  105.41,118.63 0 top
R99  10k  [TRIMPOT_5MM]  111.76,118.63 0 top
R100  10k  [TRIMPOT_5MM]  118.11,118.63 0 top
R101  10K  [0603-RES]  116.2,104.39 90 top
R102  10K  [0603-RES]  116.2,112.01 270 top
R103  10K  [0603-RES]  126.24,104.39 90 top
R104  10k  [TRIMPOT_5MM]  128.78,118.63 0 top
R105  10k  [TRIMPOT_5MM]  135.13,118.63 0 top
R106  10k  [TRIMPOT_5MM]  141.48,118.63 0 top
R107  10K  [0603-RES]  139.57,104.39 90 top
R108  10K  [0603-RES]  139.57,112.01 270 top
SJ1  N.O.  [PAD-JUMPER-2-NO_YES_SILK]  20.83,38.61 0 bottom
SJ2  N.O.  [PAD-JUMPER-2-NO_YES_SILK]  23.37,38.61 0 bottom
SJ3  N.O.  [PAD-JUMPER-2-NO_YES_SILK]  44.2,38.61 0 bottom
SJ4  N.O.  [PAD-JUMPER-2-NO_YES_SILK]  46.74,38.61 0 bottom
SJ5  N.O.  [PAD-JUMPER-2-NO_YES_SILK]  67.56,38.61 0 bottom
SJ6  N.O.  [PAD-JUMPER-2-NO_YES_SILK]  70.1,38.61 0 bottom
SJ7  N.O.  [PAD-JUMPER-2-NO_YES_SILK]  90.93,38.61 0 bottom
SJ8  N.O.  [PAD-JUMPER-2-NO_YES_SILK]  93.47,38.61 0 bottom
SJ9  N.O.  [PAD-JUMPER-2-NO_YES_SILK]  114.3,38.61 0 bottom
SJ10  N.O.  [PAD-JUMPER-2-NO_YES_SILK]  116.84,38.61 0 bottom
SJ11  N.O.  [PAD-JUMPER-2-NO_YES_SILK]  137.67,38.61 0 bottom
SJ12  N.O.  [PAD-JUMPER-2-NO_YES_SILK]  140.21,38.61 0 bottom
SJ13  N.O.  [PAD-JUMPER-2-NO_YES_SILK]  20.83,82.3 0 bottom
SJ14  N.O.  [PAD-JUMPER-2-NO_YES_SILK]  23.37,82.3 0 bottom
SJ15  N.O.  [PAD-JUMPER-2-NO_YES_SILK]  44.2,82.3 0 bottom
SJ16  N.O.  [PAD-JUMPER-2-NO_YES_SILK]  46.74,82.3 0 bottom
SJ17  N.O.  [PAD-JUMPER-2-NO_YES_SILK]  67.56,82.3 0 bottom
SJ18  N.O.  [PAD-JUMPER-2-NO_YES_SILK]  70.1,82.3 0 bottom
SJ19  N.O.  [PAD-JUMPER-2-NO_YES_SILK]  90.93,82.3 0 bottom
SJ20  N.O.  [PAD-JUMPER-2-NO_YES_SILK]  93.47,82.3 0 bottom
SJ21  N.O.  [PAD-JUMPER-2-NO_YES_SILK]  114.3,82.3 0 bottom
SJ22  N.O.  [PAD-JUMPER-2-NO_YES_SILK]  116.84,82.3 0 bottom
SJ23  N.O.  [PAD-JUMPER-2-NO_YES_SILK]  137.67,82.3 0 bottom
SJ24  N.O.  [PAD-JUMPER-2-NO_YES_SILK]  140.21,82.3 0 bottom
SJ25  N.O.  [PAD-JUMPER-2-NO_YES_SILK]  20.83,125.98 0 bottom
SJ26  N.O.  [PAD-JUMPER-2-NO_YES_SILK]  23.37,125.98 0 bottom
SJ27  N.O.  [PAD-JUMPER-2-NO_YES_SILK]  44.2,125.98 0 bottom
SJ28  N.O.  [PAD-JUMPER-2-NO_YES_SILK]  46.74,125.98 0 bottom
SJ29  N.O.  [PAD-JUMPER-2-NO_YES_SILK]  67.56,125.98 0 bottom
SJ30  N.O.  [PAD-JUMPER-2-NO_YES_SILK]  70.1,125.98 0 bottom
SJ31  N.O.  [PAD-JUMPER-2-NO_YES_SILK]  90.93,125.98 0 bottom
SJ32  N.O.  [PAD-JUMPER-2-NO_YES_SILK]  93.47,125.98 0 bottom
SJ33  N.O.  [PAD-JUMPER-2-NO_YES_SILK]  114.3,125.98 0 bottom
SJ34  N.O.  [PAD-JUMPER-2-NO_YES_SILK]  116.84,125.98 0 bottom
SJ35  N.O.  [PAD-JUMPER-2-NO_YES_SILK]  137.67,125.98 0 bottom
SJ36  N.O.  [PAD-JUMPER-2-NO_YES_SILK]  140.21,125.98 0 bottom
STANDOFF1  STAND-OFF  [STAND-OFF]  10.03,10.03 0 top
STANDOFF2  STAND-OFF  [STAND-OFF]  26.54,10.03 0 top
STANDOFF3  STAND-OFF  [STAND-OFF]  10.03,46.86 0 top
STANDOFF4  STAND-OFF  [STAND-OFF]  26.54,46.86 0 top
STANDOFF5  STAND-OFF  [STAND-OFF]  33.4,10.03 0 top
STANDOFF6  STAND-OFF  [STAND-OFF]  49.91,10.03 0 top
STANDOFF7  STAND-OFF  [STAND-OFF]  33.4,46.86 0 top
STANDOFF8  STAND-OFF  [STAND-OFF]  49.91,46.86 0 top
STANDOFF9  STAND-OFF  [STAND-OFF]  56.77,10.03 0 top
STANDOFF10  STAND-OFF  [STAND-OFF]  73.28,10.03 0 top
STANDOFF11  STAND-OFF  [STAND-OFF]  56.77,46.86 0 top
STANDOFF12  STAND-OFF  [STAND-OFF]  73.28,46.86 0 top
STANDOFF13  STAND-OFF  [STAND-OFF]  80.14,10.03 0 top
STANDOFF14  STAND-OFF  [STAND-OFF]  96.65,10.03 0 top
STANDOFF15  STAND-OFF  [STAND-OFF]  80.14,46.86 0 top
STANDOFF16  STAND-OFF  [STAND-OFF]  96.65,46.86 0 top
STANDOFF17  STAND-OFF  [STAND-OFF]  103.5,10.03 0 top
STANDOFF18  STAND-OFF  [STAND-OFF]  120.02,10.03 0 top
STANDOFF19  STAND-OFF  [STAND-OFF]  103.5,46.86 0 top
STANDOFF20  STAND-OFF  [STAND-OFF]  120.02,46.86 0 top
STANDOFF21  STAND-OFF  [STAND-OFF]  126.87,10.03 0 top
STANDOFF22  STAND-OFF  [STAND-OFF]  143.38,10.03 0 top
STANDOFF23  STAND-OFF  [STAND-OFF]  126.87,46.86 0 top
STANDOFF24  STAND-OFF  [STAND-OFF]  143.38,46.86 0 top
STANDOFF25  STAND-OFF  [STAND-OFF]  10.03,53.72 0 top
STANDOFF26  STAND-OFF  [STAND-OFF]  26.54,53.72 0 top
STANDOFF27  STAND-OFF  [STAND-OFF]  10.03,90.55 0 top
STANDOFF28  STAND-OFF  [STAND-OFF]  26.54,90.55 0 top
STANDOFF29  STAND-OFF  [STAND-OFF]  33.4,53.72 0 top
STANDOFF30  STAND-OFF  [STAND-OFF]  49.91,53.72 0 top
STANDOFF31  STAND-OFF  [STAND-OFF]  33.4,90.55 0 top
STANDOFF32  STAND-OFF  [STAND-OFF]  49.91,90.55 0 top
STANDOFF33  STAND-OFF  [STAND-OFF]  56.77,53.72 0 top
STANDOFF34  STAND-OFF  [STAND-OFF]  73.28,53.72 0 top
STANDOFF35  STAND-OFF  [STAND-OFF]  56.77,90.55 0 top
STANDOFF36  STAND-OFF  [STAND-OFF]  73.28,90.55 0 top
STANDOFF37  STAND-OFF  [STAND-OFF]  80.14,53.72 0 top
STANDOFF38  STAND-OFF  [STAND-OFF]  96.65,53.72 0 top
STANDOFF39  STAND-OFF  [STAND-OFF]  80.14,90.55 0 top
STANDOFF40  STAND-OFF  [STAND-OFF]  96.65,90.55 0 top
STANDOFF41  STAND-OFF  [STAND-OFF]  103.5,53.72 0 top
STANDOFF42  STAND-OFF  [STAND-OFF]  120.02,53.72 0 top
STANDOFF43  STAND-OFF  [STAND-OFF]  103.5,90.55 0 top
STANDOFF44  STAND-OFF  [STAND-OFF]  120.02,90.55 0 top
STANDOFF45  STAND-OFF  [STAND-OFF]  126.87,53.72 0 top
STANDOFF46  STAND-OFF  [STAND-OFF]  143.38,53.72 0 top
STANDOFF47  STAND-OFF  [STAND-OFF]  126.87,90.55 0 top
STANDOFF48  STAND-OFF  [STAND-OFF]  143.38,90.55 0 top
STANDOFF49  STAND-OFF  [STAND-OFF]  10.03,97.41 0 top
STANDOFF50  STAND-OFF  [STAND-OFF]  26.54,97.41 0 top
STANDOFF51  STAND-OFF  [STAND-OFF]  10.03,134.24 0 top
STANDOFF52  STAND-OFF  [STAND-OFF]  26.54,134.24 0 top
STANDOFF53  STAND-OFF  [STAND-OFF]  33.4,97.41 0 top
STANDOFF54  STAND-OFF  [STAND-OFF]  49.91,97.41 0 top
STANDOFF55  STAND-OFF  [STAND-OFF]  33.4,134.24 0 top
STANDOFF56  STAND-OFF  [STAND-OFF]  49.91,134.24 0 top
STANDOFF57  STAND-OFF  [STAND-OFF]  56.77,97.41 0 top
STANDOFF58  STAND-OFF  [STAND-OFF]  73.28,97.41 0 top
STANDOFF59  STAND-OFF  [STAND-OFF]  56.77,134.24 0 top
STANDOFF60  STAND-OFF  [STAND-OFF]  73.28,134.24 0 top
STANDOFF61  STAND-OFF  [STAND-OFF]  80.14,97.41 0 top
STANDOFF62  STAND-OFF  [STAND-OFF]  96.65,97.41 0 top
STANDOFF63  STAND-OFF  [STAND-OFF]  80.14,134.24 0 top
STANDOFF64  STAND-OFF  [STAND-OFF]  96.65,134.24 0 top
STANDOFF65  STAND-OFF  [STAND-OFF]  103.5,97.41 0 top
STANDOFF66  STAND-OFF  [STAND-OFF]  120.02,97.41 0 top
STANDOFF67  STAND-OFF  [STAND-OFF]  103.5,134.24 0 top
STANDOFF68  STAND-OFF  [STAND-OFF]  120.02,134.24 0 top
STANDOFF69  STAND-OFF  [STAND-OFF]  126.87,97.41 0 top
STANDOFF70  STAND-OFF  [STAND-OFF]  143.38,97.41 0 top
STANDOFF71  STAND-OFF  [STAND-OFF]  126.87,134.24 0 top
STANDOFF72  STAND-OFF  [STAND-OFF]  143.38,134.24 0 top
TP1  TEST-POINT3X4  [PAD.03X.04]  10.67,32.26 0 bottom
TP2  TEST-POINT3X4  [PAD.03X.04]  18.92,32.26 0 bottom
TP3  TEST-POINT3X4  [PAD.03X.04]  24.64,32.26 0 bottom
TP4  TEST-POINT3X4  [PAD.03X.04]  34.04,32.26 0 bottom
TP5  TEST-POINT3X4  [PAD.03X.04]  42.29,32.26 0 bottom
TP6  TEST-POINT3X4  [PAD.03X.04]  48.01,32.26 0 bottom
TP7  TEST-POINT3X4  [PAD.03X.04]  57.4,32.26 0 bottom
TP8  TEST-POINT3X4  [PAD.03X.04]  65.66,32.26 0 bottom
TP9  TEST-POINT3X4  [PAD.03X.04]  71.37,32.26 0 bottom
TP10  TEST-POINT3X4  [PAD.03X.04]  80.77,32.26 0 bottom
TP11  TEST-POINT3X4  [PAD.03X.04]  89.03,32.26 0 bottom
TP12  TEST-POINT3X4  [PAD.03X.04]  94.74,32.26 0 bottom
TP13  TEST-POINT3X4  [PAD.03X.04]  104.14,32.26 0 bottom
TP14  TEST-POINT3X4  [PAD.03X.04]  112.39,32.26 0 bottom
TP15  TEST-POINT3X4  [PAD.03X.04]  118.11,32.26 0 bottom
TP16  TEST-POINT3X4  [PAD.03X.04]  127.51,32.26 0 bottom
TP17  TEST-POINT3X4  [PAD.03X.04]  135.76,32.26 0 bottom
TP18  TEST-POINT3X4  [PAD.03X.04]  141.48,32.26 0 bottom
TP19  TEST-POINT3X4  [PAD.03X.04]  10.67,75.95 0 bottom
TP20  TEST-POINT3X4  [PAD.03X.04]  18.92,75.95 0 bottom
TP21  TEST-POINT3X4  [PAD.03X.04]  24.64,75.95 0 bottom
TP22  TEST-POINT3X4  [PAD.03X.04]  34.04,75.95 0 bottom
TP23  TEST-POINT3X4  [PAD.03X.04]  42.29,75.95 0 bottom
TP24  TEST-POINT3X4  [PAD.03X.04]  48.01,75.95 0 bottom
TP25  TEST-POINT3X4  [PAD.03X.04]  57.4,75.95 0 bottom
TP26  TEST-POINT3X4  [PAD.03X.04]  65.66,75.95 0 bottom
TP27  TEST-POINT3X4  [PAD.03X.04]  71.37,75.95 0 bottom
TP28  TEST-POINT3X4  [PAD.03X.04]  80.77,75.95 0 bottom
TP29  TEST-POINT3X4  [PAD.03X.04]  89.03,75.95 0 bottom
TP30  TEST-POINT3X4  [PAD.03X.04]  94.74,75.95 0 bottom
TP31  TEST-POINT3X4  [PAD.03X.04]  104.14,75.95 0 bottom
TP32  TEST-POINT3X4  [PAD.03X.04]  112.39,75.95 0 bottom
TP33  TEST-POINT3X4  [PAD.03X.04]  118.11,75.95 0 bottom
TP34  TEST-POINT3X4  [PAD.03X.04]  127.51,75.95 0 bottom
TP35  TEST-POINT3X4  [PAD.03X.04]  135.76,75.95 0 bottom
TP36  TEST-POINT3X4  [PAD.03X.04]  141.48,75.95 0 bottom
TP37  TEST-POINT3X4  [PAD.03X.04]  10.67,119.63 0 bottom
TP38  TEST-POINT3X4  [PAD.03X.04]  18.92,119.63 0 bottom
TP39  TEST-POINT3X4  [PAD.03X.04]  24.64,119.63 0 bottom
TP40  TEST-POINT3X4  [PAD.03X.04]  34.04,119.63 0 bottom
TP41  TEST-POINT3X4  [PAD.03X.04]  42.29,119.63 0 bottom
TP42  TEST-POINT3X4  [PAD.03X.04]  48.01,119.63 0 bottom
TP43  TEST-POINT3X4  [PAD.03X.04]  57.4,119.63 0 bottom
TP44  TEST-POINT3X4  [PAD.03X.04]  65.66,119.63 0 bottom
TP45  TEST-POINT3X4  [PAD.03X.04]  71.37,119.63 0 bottom
TP46  TEST-POINT3X4  [PAD.03X.04]  80.77,119.63 0 bottom
TP47  TEST-POINT3X4  [PAD.03X.04]  89.03,119.63 0 bottom
TP48  TEST-POINT3X4  [PAD.03X.04]  94.74,119.63 0 bottom
TP49  TEST-POINT3X4  [PAD.03X.04]  104.14,119.63 0 bottom
TP50  TEST-POINT3X4  [PAD.03X.04]  112.39,119.63 0 bottom
TP51  TEST-POINT3X4  [PAD.03X.04]  118.11,119.63 0 bottom
TP52  TEST-POINT3X4  [PAD.03X.04]  127.51,119.63 0 bottom
TP53  TEST-POINT3X4  [PAD.03X.04]  135.76,119.63 0 bottom
TP54  TEST-POINT3X4  [PAD.03X.04]  141.48,119.63 0 bottom
U1  ATTINY84  [SO14]  15.75,20.83 0 top
U2  ATTINY84  [SO14]  39.12,20.83 0 top
U3  ATTINY84  [SO14]  62.48,20.83 0 top
U4  ATTINY84  [SO14]  85.85,20.83 0 top
U5  ATTINY84  [SO14]  109.22,20.83 0 top
U6  ATTINY84  [SO14]  132.59,20.83 0 top
U7  ATTINY84  [SO14]  15.75,64.52 0 top
U8  ATTINY84  [SO14]  39.12,64.52 0 top
U9  ATTINY84  [SO14]  62.48,64.52 0 top
U10  ATTINY84  [SO14]  85.85,64.52 0 top
U11  ATTINY84  [SO14]  109.22,64.52 0 top
U12  ATTINY84  [SO14]  132.59,64.52 0 top
U13  ATTINY84  [SO14]  15.75,108.2 0 top
U14  ATTINY84  [SO14]  39.12,108.2 0 top
U15  ATTINY84  [SO14]  62.48,108.2 0 top
U16  ATTINY84  [SO14]  85.85,108.2 0 top
U17  ATTINY84  [SO14]  109.22,108.2 0 top
U18  ATTINY84  [SO14]  132.59,108.2 0 top
Y1  16MHZ  [RESONATOR-SMD]  13.21,14.48 180 top
Y2  16MHZ  [RESONATOR-SMD]  36.58,14.48 180 top
Y3  16MHZ  [RESONATOR-SMD]  59.94,14.48 180 top
Y4  16MHZ  [RESONATOR-SMD]  83.31,14.48 180 top
Y5  16MHZ  [RESONATOR-SMD]  106.68,14.48 180 top
Y6  16MHZ  [RESONATOR-SMD]  130.05,14.48 180 top
Y7  16MHZ  [RESONATOR-SMD]  13.21,58.17 180 top
Y8  16MHZ  [RESONATOR-SMD]  36.58,58.17 180 top
Y9  16MHZ  [RESONATOR-SMD]  59.94,58.17 180 top
Y10  16MHZ  [RESONATOR-SMD]  83.31,58.17 180 top
Y11  16MHZ  [RESONATOR-SMD]  106.68,58.17 180 top
Y12  16MHZ  [RESONATOR-SMD]  130.05,58.17 180 top
Y13  16MHZ  [RESONATOR-SMD]  13.21,101.85 180 top
Y14  16MHZ  [RESONATOR-SMD]  36.58,101.85 180 top
Y15  16MHZ  [RESONATOR-SMD]  59.94,101.85 180 top
Y16  16MHZ  [RESONATOR-SMD]  83.31,101.85 180 top
Y17  16MHZ  [RESONATOR-SMD]  106.68,101.85 180 top
Y18  16MHZ  [RESONATOR-SMD]  130.05,101.85 180 top

## Library data of the parts
C1 C3 C6 C8 C10 C12 C14 C16 C18 C20 C22 C24 C26 C28 C30 C32 C34 C36 = SparkFun-Capacitors; PROD_ID: CAP-00811
C2 C4 C5 C7 C9 C11 C13 C15 C17 C19 C21 C23 C25 C27 C29 C31 C33 C35 = SparkFun-Capacitors; PROD_ID: CAP-00810
E$1 = SparkFun-Retired
E$4 E$5 FID1-FID36 LOGO1-LOGO54 = SparkFun-Aesthetics
JP1-JP90 = SparkFun-Connectors
R1-R3 R8-R10 R14-R16 R20-R22 R26-R28 R32-R34 R38-R40 R44-R46 R50-R52 R56-R58 R62-R64 R68-R70 R74-R76 R80-R82 R86-R88 R92-R94 R98-R100 R104-R106 = SparkFun-Electromechanical; PROD_ID: RES-11156
R4-R7 R11-R13 R17-R19 R23-R25 R29-R31 R35-R37 R41-R43 R47-R49 R53-R55 R59-R61 R65-R67 R71-R73 R77-R79 R83-R85 R89-R91 R95-R97 R101-R103 R107 R108 = SparkFun-Resistors; PROD_ID: RES-00824
SJ1-SJ36 TP1-TP54 = SparkFun-Passives
STANDOFF1-STANDOFF72 = SparkFun-Electromechanical
U1-U18 = SparkFun-DigitalIC; PROD_ID: IC-11285
Y1-Y18 = SparkFun-FreqCtrl; PROD_ID: XTAL-08900

## Nets
A: R1.B TP1.P$1 U1.13
A1: R8.B TP4.P$1 U2.13
A2: R14.B TP7.P$1 U3.13
A3: R20.B TP10.P$1 U4.13
A4: R26.B TP13.P$1 U5.13
A5: R32.B TP16.P$1 U6.13
A6: R38.B TP19.P$1 U7.13
A7: R44.B TP22.P$1 U8.13
A8: R50.B TP25.P$1 U9.13
A9: R56.B TP28.P$1 U10.13
A10: R62.B TP31.P$1 U11.13
A11: R68.B TP34.P$1 U12.13
A12: R74.B TP37.P$1 U13.13
A13: R80.B TP40.P$1 U14.13
A14: R86.B TP43.P$1 U15.13
A15: R92.B TP46.P$1 U16.13
A16: R98.B TP49.P$1 U17.13
A17: R104.B TP52.P$1 U18.13
B: R2.B TP2.P$1 U1.10
B1: R9.B TP5.P$1 U2.10
B2: R15.B TP8.P$1 U3.10
B3: R21.B TP11.P$1 U4.10
B4: R27.B TP14.P$1 U5.10
B5: R33.B TP17.P$1 U6.10
B6: R39.B TP20.P$1 U7.10
B7: R45.B TP23.P$1 U8.10
B8: R51.B TP26.P$1 U9.10
B9: R57.B TP29.P$1 U10.10
B10: R63.B TP32.P$1 U11.10
B11: R69.B TP35.P$1 U12.10
B12: R75.B TP38.P$1 U13.10
B13: R81.B TP41.P$1 U14.10
B14: R87.B TP44.P$1 U15.10
B15: R93.B TP47.P$1 U16.10
B16: R99.B TP50.P$1 U17.10
B17: R105.B TP53.P$1 U18.10
BTN: JP1.1 U1.12
BTN1: JP6.1 U2.12
BTN2: JP12.1 U3.12
BTN3: JP17.1 U4.12
BTN4: JP22.1 U5.12
BTN5: JP27.1 U6.12
BTN6: JP32.1 U7.12
BTN7: JP37.1 U8.12
BTN8: JP42.1 U9.12
BTN9: JP47.1 U10.12
BTN10: JP52.1 U11.12
BTN11: JP57.1 U12.12
BTN12: JP62.1 U13.12
BTN13: JP67.1 U14.12
BTN14: JP72.1 U15.12
BTN15: JP77.1 U16.12
BTN16: JP82.1 U17.12
BTN17: JP87.1 U18.12
GND: C1.C C5.2 JP1.2 JP2.1 JP3.1 JP4.1 JP9.6 R1.A R2.A R3.A SJ1.1 SJ2.1 U1.14 Y1.2
GND1: C2.2 C3.C JP5.6 JP6.2 JP7.1 JP8.1 JP10.1 R8.A R9.A R10.A SJ3.1 SJ4.1 U2.14 Y2.2
GND2: C4.2 C6.C JP11.6 JP12.2 JP13.1 JP14.1 JP15.1 R14.A R15.A R16.A SJ5.1 SJ6.1 U3.14 Y3.2
GND3: C7.2 C8.C JP16.6 JP17.2 JP18.1 JP19.1 JP20.1 R20.A R21.A R22.A SJ7.1 SJ8.1 U4.14 Y4.2
GND4: C9.2 C10.C JP21.6 JP22.2 JP23.1 JP24.1 JP25.1 R26.A R27.A R28.A SJ9.1 SJ10.1 U5.14 Y5.2
GND5: C11.2 C12.C JP26.6 JP27.2 JP28.1 JP29.1 JP30.1 R32.A R33.A R34.A SJ11.1 SJ12.1 U6.14 Y6.2
GND6: C13.2 C14.C JP31.6 JP32.2 JP33.1 JP34.1 JP35.1 R38.A R39.A R40.A SJ13.1 SJ14.1 U7.14 Y7.2
GND7: C15.2 C16.C JP36.6 JP37.2 JP38.1 JP39.1 JP40.1 R44.A R45.A R46.A SJ15.1 SJ16.1 U8.14 Y8.2
GND8: C17.2 C18.C JP41.6 JP42.2 JP43.1 JP44.1 JP45.1 R50.A R51.A R52.A SJ17.1 SJ18.1 U9.14 Y9.2
GND9: C19.2 C20.C JP46.6 JP47.2 JP48.1 JP49.1 JP50.1 R56.A R57.A R58.A SJ19.1 SJ20.1 U10.14 Y10.2
GND10: C21.2 C22.C JP51.6 JP52.2 JP53.1 JP54.1 JP55.1 R62.A R63.A R64.A SJ21.1 SJ22.1 U11.14 Y11.2
GND11: C23.2 C24.C JP56.6 JP57.2 JP58.1 JP59.1 JP60.1 R68.A R69.A R70.A SJ23.1 SJ24.1 U12.14 Y12.2
GND12: C25.2 C26.C JP61.6 JP62.2 JP63.1 JP64.1 JP65.1 R74.A R75.A R76.A SJ25.1 SJ26.1 U13.14 Y13.2
GND13: C27.2 C28.C JP66.6 JP67.2 JP68.1 JP69.1 JP70.1 R80.A R81.A R82.A SJ27.1 SJ28.1 U14.14 Y14.2
GND14: C29.2 C30.C JP71.6 JP72.2 JP73.1 JP74.1 JP75.1 R86.A R87.A R88.A SJ29.1 SJ30.1 U15.14 Y15.2
GND15: C31.2 C32.C JP76.6 JP77.2 JP78.1 JP79.1 JP80.1 R92.A R93.A R94.A SJ31.1 SJ32.1 U16.14 Y16.2
GND16: C33.2 C34.C JP81.6 JP82.2 JP83.1 JP84.1 JP85.1 R98.A R99.A R100.A SJ33.1 SJ34.1 U17.14 Y17.2
GND17: C35.2 C36.C JP86.6 JP87.2 JP88.1 JP89.1 JP90.1 R104.A R105.A R106.A SJ35.1 SJ36.1 U18.14 Y18.2
MISO: JP9.1 U1.8
MISO1: JP5.1 U2.8
MISO2: JP11.1 U3.8
MISO3: JP16.1 U4.8
MISO4: JP21.1 U5.8
MISO5: JP26.1 U6.8
MISO6: JP31.1 U7.8
MISO7: JP36.1 U8.8
MISO8: JP41.1 U9.8
MISO9: JP46.1 U10.8
MISO10: JP51.1 U11.8
MISO11: JP56.1 U12.8
MISO12: JP61.1 U13.8
MISO13: JP66.1 U14.8
MISO14: JP71.1 U15.8
MISO15: JP76.1 U16.8
MISO16: JP81.1 U17.8
MISO17: JP86.1 U18.8
MODESEL: R5.1 SJ1.2 U1.5
MODESEL1: R11.1 SJ3.2 U2.5
MODESEL2: R17.1 SJ5.2 U3.5
MODESEL3: R23.1 SJ7.2 U4.5
MODESEL4: R29.1 SJ9.2 U5.5
MODESEL5: R35.1 SJ11.2 U6.5
MODESEL6: R41.1 SJ13.2 U7.5
MODESEL7: R47.1 SJ15.2 U8.5
MODESEL8: R53.1 SJ17.2 U9.5
MODESEL9: R59.1 SJ19.2 U10.5
MODESEL10: R65.1 SJ21.2 U11.5
MODESEL11: R71.1 SJ23.2 U12.5
MODESEL12: R77.1 SJ25.2 U13.5
MODESEL13: R83.1 SJ27.2 U14.5
MODESEL14: R89.1 SJ29.2 U15.5
MODESEL15: R95.1 SJ31.2 U16.5
MODESEL16: R101.1 SJ33.2 U17.5
MODESEL17: R107.1 SJ35.2 U18.5
MOSI/PWM: JP2.3 JP9.4 U1.7
MOSI/PWM1: JP5.4 JP7.3 U2.7
MOSI/PWM2: JP11.4 JP13.3 U3.7
MOSI/PWM3: JP16.4 JP18.3 U4.7
MOSI/PWM4: JP21.4 JP23.3 U5.7
MOSI/PWM5: JP26.4 JP28.3 U6.7
MOSI/PWM6: JP31.4 JP33.3 U7.7
MOSI/PWM7: JP36.4 JP38.3 U8.7
MOSI/PWM8: JP41.4 JP43.3 U9.7
MOSI/PWM9: JP46.4 JP48.3 U10.7
MOSI/PWM10: JP51.4 JP53.3 U11.7
MOSI/PWM11: JP56.4 JP58.3 U12.7
MOSI/PWM12: JP61.4 JP63.3 U13.7
MOSI/PWM13: JP66.4 JP68.3 U14.7
MOSI/PWM14: JP71.4 JP73.3 U15.7
MOSI/PWM15: JP76.4 JP78.3 U16.7
MOSI/PWM16: JP81.4 JP83.3 U17.7
MOSI/PWM17: JP86.4 JP88.3 U18.7
N$1: U2.3 Y2.1
N$2: U2.2 Y2.3
N$3: U1.3 Y1.1
N$4: U1.2 Y1.3
N$5: U3.3 Y3.1
N$6: U3.2 Y3.3
N$7: U4.3 Y4.1
N$8: U4.2 Y4.3
N$9: U5.3 Y5.1
N$10: U5.2 Y5.3
N$11: U6.3 Y6.1
N$12: U6.2 Y6.3
N$13: U7.3 Y7.1
N$14: U7.2 Y7.3
N$15: U8.3 Y8.1
N$16: U8.2 Y8.3
N$17: U9.3 Y9.1
N$18: U9.2 Y9.3
N$19: U10.3 Y10.1
N$20: U10.2 Y10.3
N$21: U11.3 Y11.1
N$22: U11.2 Y11.3
N$23: U12.3 Y12.1
N$24: U12.2 Y12.3
N$25: U13.3 Y13.1
N$26: U13.2 Y13.3
N$27: U14.3 Y14.1
N$28: U14.2 Y14.3
N$29: U15.3 Y15.1
N$30: U15.2 Y15.3
N$31: U16.3 Y16.1
N$32: U16.2 Y16.3
N$33: U17.3 Y17.1
N$34: U17.2 Y17.3
N$35: U18.3 Y18.1
N$36: U18.2 Y18.3
POLSEL: R6.1 SJ2.2 U1.11
POLSEL1: R12.1 SJ4.2 U2.11
POLSEL2: R18.1 SJ6.2 U3.11
POLSEL3: R24.1 SJ8.2 U4.11
POLSEL4: R30.1 SJ10.2 U5.11
POLSEL5: R36.1 SJ12.2 U6.11
POLSEL6: R42.1 SJ14.2 U7.11
POLSEL7: R48.1 SJ16.2 U8.11
POLSEL8: R54.1 SJ18.2 U9.11
POLSEL9: R60.1 SJ20.2 U10.11
POLSEL10: R66.1 SJ22.2 U11.11
POLSEL11: R72.1 SJ24.2 U12.11
POLSEL12: R78.1 SJ26.2 U13.11
POLSEL13: R84.1 SJ28.2 U14.11
POLSEL14: R90.1 SJ30.2 U15.11
POLSEL15: R96.1 SJ32.2 U16.11
POLSEL16: R102.1 SJ34.2 U17.11
POLSEL17: R108.1 SJ36.2 U18.11
RESET: JP9.5 R4.1 U1.4
RESET1: JP5.5 R7.1 U2.4
RESET2: JP11.5 R13.1 U3.4
RESET3: JP16.5 R19.1 U4.4
RESET4: JP21.5 R25.1 U5.4
RESET5: JP26.5 R31.1 U6.4
RESET6: JP31.5 R37.1 U7.4
RESET7: JP36.5 R43.1 U8.4
RESET8: JP41.5 R49.1 U9.4
RESET9: JP46.5 R55.1 U10.4
RESET10: JP51.5 R61.1 U11.4
RESET11: JP56.5 R67.1 U12.4
RESET12: JP61.5 R73.1 U13.4
RESET13: JP66.5 R79.1 U14.4
RESET14: JP71.5 R85.1 U15.4
RESET15: JP76.5 R91.1 U16.4
RESET16: JP81.5 R97.1 U17.4
RESET17: JP86.5 R103.1 U18.4
SCK: JP9.3 U1.9
SCK1: JP5.3 U2.9
SCK2: JP11.3 U3.9
SCK3: JP16.3 U4.9
SCK4: JP21.3 U5.9
SCK5: JP26.3 U6.9
SCK6: JP31.3 U7.9
SCK7: JP36.3 U8.9
SCK8: JP41.3 U9.9
SCK9: JP46.3 U10.9
SCK10: JP51.3 U11.9
SCK11: JP56.3 U12.9
SCK12: JP61.3 U13.9
SCK13: JP66.3 U14.9
SCK14: JP71.3 U15.9
SCK15: JP76.3 U16.9
SCK16: JP81.3 U17.9
SCK17: JP86.3 U18.9
T: R3.B TP3.P$1 U1.6
T1: R10.B TP6.P$1 U2.6
T2: R16.B TP9.P$1 U3.6
T3: R22.B TP12.P$1 U4.6
T4: R28.B TP15.P$1 U5.6
T5: R34.B TP18.P$1 U6.6
T6: R40.B TP21.P$1 U7.6
T7: R46.B TP24.P$1 U8.6
T8: R52.B TP27.P$1 U9.6
T9: R58.B TP30.P$1 U10.6
T10: R64.B TP33.P$1 U11.6
T11: R70.B TP36.P$1 U12.6
T12: R76.B TP39.P$1 U13.6
T13: R82.B TP42.P$1 U14.6
T14: R88.B TP45.P$1 U15.6
T15: R94.B TP48.P$1 U16.6
T16: R100.B TP51.P$1 U17.6
T17: R106.B TP54.P$1 U18.6
VCC: C1.A C5.1 JP2.2 JP3.2 JP4.2 JP9.2 R1.C R2.C R3.C R4.2 R5.2 R6.2 U1.1
VCC1: C2.1 C3.A JP5.2 JP7.2 JP8.2 JP10.2 R7.2 R8.C R9.C R10.C R11.2 R12.2 U2.1
VCC2: C4.1 C6.A JP11.2 JP13.2 JP14.2 JP15.2 R13.2 R14.C R15.C R16.C R17.2 R18.2 U3.1
VCC3: C7.1 C8.A JP16.2 JP18.2 JP19.2 JP20.2 R19.2 R20.C R21.C R22.C R23.2 R24.2 U4.1
VCC4: C9.1 C10.A JP21.2 JP23.2 JP24.2 JP25.2 R25.2 R26.C R27.C R28.C R29.2 R30.2 U5.1
VCC5: C11.1 C12.A JP26.2 JP28.2 JP29.2 JP30.2 R31.2 R32.C R33.C R34.C R35.2 R36.2 U6.1
VCC6: C13.1 C14.A JP31.2 JP33.2 JP34.2 JP35.2 R37.2 R38.C R39.C R40.C R41.2 R42.2 U7.1
VCC7: C15.1 C16.A JP36.2 JP38.2 JP39.2 JP40.2 R43.2 R44.C R45.C R46.C R47.2 R48.2 U8.1
VCC8: C17.1 C18.A JP41.2 JP43.2 JP44.2 JP45.2 R49.2 R50.C R51.C R52.C R53.2 R54.2 U9.1
VCC9: C19.1 C20.A JP46.2 JP48.2 JP49.2 JP50.2 R55.2 R56.C R57.C R58.C R59.2 R60.2 U10.1
VCC10: C21.1 C22.A JP51.2 JP53.2 JP54.2 JP55.2 R61.2 R62.C R63.C R64.C R65.2 R66.2 U11.1
VCC11: C23.1 C24.A JP56.2 JP58.2 JP59.2 JP60.2 R67.2 R68.C R69.C R70.C R71.2 R72.2 U12.1
VCC12: C25.1 C26.A JP61.2 JP63.2 JP64.2 JP65.2 R73.2 R74.C R75.C R76.C R77.2 R78.2 U13.1
VCC13: C27.1 C28.A JP66.2 JP68.2 JP69.2 JP70.2 R79.2 R80.C R81.C R82.C R83.2 R84.2 U14.1
VCC14: C29.1 C30.A JP71.2 JP73.2 JP74.2 JP75.2 R85.2 R86.C R87.C R88.C R89.2 R90.2 U15.1
VCC15: C31.1 C32.A JP76.2 JP78.2 JP79.2 JP80.2 R91.2 R92.C R93.C R94.C R95.2 R96.2 U16.1
VCC16: C33.1 C34.A JP81.2 JP83.2 JP84.2 JP85.2 R97.2 R98.C R99.C R100.C R101.2 R102.2 U17.1
VCC17: C35.1 C36.A JP86.2 JP88.2 JP89.2 JP90.2 R103.2 R104.C R105.C R106.C R107.2 R108.2 U18.1

## Tracks (layer width: path | path; a pad name or v marks a point on that pad's centre or on a via)
A  (via drill 0.51)
  Top 0.254: v9.91,27.18 12.7,27.18 13.21,26.67 U1.13 | R1.B 11.94,32.77 11.43,32.26 TP1.P$1
  Bottom 0.254: TP1.P$1 10.67,27.56 10.29,27.18 v9.91,27.18
  other vias: 10.67,32.26
A1  (via drill 0.51)
  Top 0.254: v33.27,27.18 36.07,27.18 36.58,26.67 U2.13 | R8.B 35.31,32.77 34.8,32.26 TP4.P$1
  Bottom 0.254: TP4.P$1 34.04,27.56 33.66,27.18 v33.27,27.18
  other vias: 34.04,32.26
A2  (via drill 0.51)
  Top 0.254: v56.64,27.18 59.44,27.18 59.94,26.67 U3.13 | R14.B 58.67,32.77 58.17,32.26 TP7.P$1
  Bottom 0.254: TP7.P$1 57.4,27.56 57.02,27.18 v56.64,27.18
  other vias: 57.4,32.26
A3  (via drill 0.51)
  Top 0.254: v80.01,27.18 82.8,27.18 83.31,26.67 U4.13 | R20.B 82.04,32.77 81.53,32.26 TP10.P$1
  Bottom 0.254: TP10.P$1 80.77,27.56 80.39,27.18 v80.01,27.18
  other vias: 80.77,32.26
A4  (via drill 0.51)
  Top 0.254: v103.38,27.18 106.17,27.18 106.68,26.67 U5.13 | R26.B 105.41,32.77 104.9,32.26 TP13.P$1
  Bottom 0.254: TP13.P$1 104.14,27.56 103.76,27.18 v103.38,27.18
  other vias: 104.14,32.26
A5  (via drill 0.51)
  Top 0.254: v126.75,27.18 129.54,27.18 130.05,26.67 U6.13 | R32.B 128.78,32.77 128.27,32.26 TP16.P$1
  Bottom 0.254: TP16.P$1 127.51,27.56 127.13,27.18 v126.75,27.18
  other vias: 127.51,32.26
A6  (via drill 0.51)
  Top 0.254: v9.91,70.87 12.7,70.87 13.21,70.36 U7.13 | R38.B 11.94,76.45 11.43,75.95 TP19.P$1
  Bottom 0.254: TP19.P$1 10.67,71.25 10.29,70.87 v9.91,70.87
  other vias: 10.67,75.95
A7  (via drill 0.51)
  Top 0.254: v33.27,70.87 36.07,70.87 36.58,70.36 U8.13 | R44.B 35.31,76.45 34.8,75.95 TP22.P$1
  Bottom 0.254: TP22.P$1 34.04,71.25 33.66,70.87 v33.27,70.87
  other vias: 34.04,75.95
A8  (via drill 0.51)
  Top 0.254: v56.64,70.87 59.44,70.87 59.94,70.36 U9.13 | R50.B 58.67,76.45 58.17,75.95 TP25.P$1
  Bottom 0.254: TP25.P$1 57.4,71.25 57.02,70.87 v56.64,70.87
  other vias: 57.4,75.95
A9  (via drill 0.51)
  Top 0.254: v80.01,70.87 82.8,70.87 83.31,70.36 U10.13 | R56.B 82.04,76.45 81.53,75.95 TP28.P$1
  Bottom 0.254: TP28.P$1 80.77,71.25 80.39,70.87 v80.01,70.87
  other vias: 80.77,75.95
A10  (via drill 0.51)
  Top 0.254: v103.38,70.87 106.17,70.87 106.68,70.36 U11.13 | R62.B 105.41,76.45 104.9,75.95 TP31.P$1
  Bottom 0.254: TP31.P$1 104.14,71.25 103.76,70.87 v103.38,70.87
  other vias: 104.14,75.95
A11  (via drill 0.51)
  Top 0.254: v126.75,70.87 129.54,70.87 130.05,70.36 U12.13 | R68.B 128.78,76.45 128.27,75.95 TP34.P$1
  Bottom 0.254: TP34.P$1 127.51,71.25 127.13,70.87 v126.75,70.87
  other vias: 127.51,75.95
A12  (via drill 0.51)
  Top 0.254: v9.91,114.55 12.7,114.55 13.21,114.05 U13.13 | R74.B 11.94,120.14 11.43,119.63 TP37.P$1
  Bottom 0.254: TP37.P$1 10.67,114.94 10.29,114.55 v9.91,114.55
  other vias: 10.67,119.63
A13  (via drill 0.51)
  Top 0.254: v33.27,114.55 36.07,114.55 36.58,114.05 U14.13 | R80.B 35.31,120.14 34.8,119.63 TP40.P$1
  Bottom 0.254: TP40.P$1 34.04,114.94 33.66,114.55 v33.27,114.55
  other vias: 34.04,119.63
A14  (via drill 0.51)
  Top 0.254: v56.64,114.55 59.44,114.55 59.94,114.05 U15.13 | R86.B 58.67,120.14 58.17,119.63 TP43.P$1
  Bottom 0.254: TP43.P$1 57.4,114.94 57.02,114.55 v56.64,114.55
  other vias: 57.4,119.63
A15  (via drill 0.51)
  Top 0.254: v80.01,114.55 82.8,114.55 83.31,114.05 U16.13 | R92.B 82.04,120.14 81.53,119.63 TP46.P$1
  Bottom 0.254: TP46.P$1 80.77,114.94 80.39,114.55 v80.01,114.55
  other vias: 80.77,119.63
A16  (via drill 0.51)
  Top 0.254: v103.38,114.55 106.17,114.55 106.68,114.05 U17.13 | R98.B 105.41,120.14 104.9,119.63 TP49.P$1
  Bottom 0.254: TP49.P$1 104.14,114.94 103.76,114.55 v103.38,114.55
  other vias: 104.14,119.63
A17  (via drill 0.51)
  Top 0.254: v126.75,114.55 129.54,114.55 130.05,114.05 U18.13 | R104.B 128.78,120.14 128.27,119.63 TP52.P$1
  Bottom 0.254: TP52.P$1 127.51,114.94 127.13,114.55 v126.75,114.55
  other vias: 127.51,119.63
B  (via drill 0.51)
  Top 0.254: R2.B 18.29,32.89 TP2.P$1 | U1.10 17.02,24.89 17.27,25.15 v18.8,25.15
  Bottom 0.254: TP2.P$1 18.92,27.81 17.78,26.67 17.78,26.16 v18.8,25.15
  other vias: 18.92,32.26
B1  (via drill 0.51)
  Top 0.254: R9.B 41.66,32.89 TP5.P$1 | U2.10 40.39,24.89 40.64,25.15 v42.16,25.15
  Bottom 0.254: TP5.P$1 42.29,27.81 41.15,26.67 41.15,26.16 v42.16,25.15
  other vias: 42.29,32.26
B2  (via drill 0.51)
  Top 0.254: R15.B 65.02,32.89 TP8.P$1 | U3.10 63.75,24.89 64.01,25.15 v65.53,25.15
  Bottom 0.254: TP8.P$1 65.66,27.81 64.52,26.67 64.52,26.16 v65.53,25.15
  other vias: 65.66,32.26
B3  (via drill 0.51)
  Top 0.254: R21.B 88.39,32.89 TP11.P$1 | U4.10 87.12,24.89 87.38,25.15 v88.9,25.15
  Bottom 0.254: TP11.P$1 89.03,27.81 87.88,26.67 87.88,26.16 v88.9,25.15
  other vias: 89.03,32.26
B4  (via drill 0.51)
  Top 0.254: R27.B 111.76,32.89 TP14.P$1 | U5.10 110.49,24.89 110.74,25.15 v112.27,25.15
  Bottom 0.254: TP14.P$1 112.39,27.81 111.25,26.67 111.25,26.16 v112.27,25.15
  other vias: 112.39,32.26
B5  (via drill 0.51)
  Top 0.254: R33.B 135.13,32.89 TP17.P$1 | U6.10 133.86,24.89 134.11,25.15 v135.64,25.15
  Bottom 0.254: TP17.P$1 135.76,27.81 134.62,26.67 134.62,26.16 v135.64,25.15
  other vias: 135.76,32.26
B6  (via drill 0.51)
  Top 0.254: R39.B 18.29,76.58 TP20.P$1 | U7.10 17.02,68.58 17.27,68.83 v18.8,68.83
  Bottom 0.254: TP20.P$1 18.92,71.5 17.78,70.36 17.78,69.85 v18.8,68.83
  other vias: 18.92,75.95
B7  (via drill 0.51)
  Top 0.254: R45.B 41.66,76.58 TP23.P$1 | U8.10 40.39,68.58 40.64,68.83 v42.16,68.83
  Bottom 0.254: TP23.P$1 42.29,71.5 41.15,70.36 41.15,69.85 v42.16,68.83
  other vias: 42.29,75.95
B8  (via drill 0.51)
  Top 0.254: R51.B 65.02,76.58 TP26.P$1 | U9.10 63.75,68.58 64.01,68.83 v65.53,68.83
  Bottom 0.254: TP26.P$1 65.66,71.5 64.52,70.36 64.52,69.85 v65.53,68.83
  other vias: 65.66,75.95
B9  (via drill 0.51)
  Top 0.254: R57.B 88.39,76.58 TP29.P$1 | U10.10 87.12,68.58 87.38,68.83 v88.9,68.83
  Bottom 0.254: TP29.P$1 89.03,71.5 87.88,70.36 87.88,69.85 v88.9,68.83
  other vias: 89.03,75.95
B10  (via drill 0.51)
  Top 0.254: R63.B 111.76,76.58 TP32.P$1 | U11.10 110.49,68.58 110.74,68.83 v112.27,68.83
  Bottom 0.254: TP32.P$1 112.39,71.5 111.25,70.36 111.25,69.85 v112.27,68.83
  other vias: 112.39,75.95
B11  (via drill 0.51)
  Top 0.254: R69.B 135.13,76.58 TP35.P$1 | U12.10 133.86,68.58 134.11,68.83 v135.64,68.83
  Bottom 0.254: TP35.P$1 135.76,71.5 134.62,70.36 134.62,69.85 v135.64,68.83
  other vias: 135.76,75.95
B12  (via drill 0.51)
  Top 0.254: R75.B 18.29,120.27 TP38.P$1 | U13.10 17.02,112.27 17.27,112.52 v18.8,112.52
  Bottom 0.254: TP38.P$1 18.92,115.19 17.78,114.05 17.78,113.54 v18.8,112.52
  other vias: 18.92,119.63
B13  (via drill 0.51)
  Top 0.254: R81.B 41.66,120.27 TP41.P$1 | U14.10 40.39,112.27 40.64,112.52 v42.16,112.52
  Bottom 0.254: TP41.P$1 42.29,115.19 41.15,114.05 41.15,113.54 v42.16,112.52
  other vias: 42.29,119.63
B14  (via drill 0.51)
  Top 0.254: R87.B 65.02,120.27 TP44.P$1 | U15.10 63.75,112.27 64.01,112.52 v65.53,112.52
  Bottom 0.254: TP44.P$1 65.66,115.19 64.52,114.05 64.52,113.54 v65.53,112.52
  other vias: 65.66,119.63
B15  (via drill 0.51)
  Top 0.254: R93.B 88.39,120.27 TP47.P$1 | U16.10 87.12,112.27 87.38,112.52 v88.9,112.52
  Bottom 0.254: TP47.P$1 89.03,115.19 87.88,114.05 87.88,113.54 v88.9,112.52
  other vias: 89.03,119.63
B16  (via drill 0.51)
  Top 0.254: R99.B 111.76,120.27 TP50.P$1 | U17.10 110.49,112.27 110.74,112.52 v112.27,112.52
  Bottom 0.254: TP50.P$1 112.39,115.19 111.25,114.05 111.25,113.54 v112.27,112.52
  other vias: 112.39,119.63
B17  (via drill 0.51)
  Top 0.254: R105.B 135.13,120.27 TP53.P$1 | U18.10 133.86,112.27 134.11,112.52 v135.64,112.52
  Bottom 0.254: TP53.P$1 135.76,115.19 134.62,114.05 134.62,113.54 v135.64,112.52
  other vias: 135.76,119.63
BTN  (via drill 0.51)
  Top 0.254: JP1.1 17.02,11.3 v17.65,11.94 | v15.11,20.83 15.11,21.46 14.48,22.1 U1.12
  Bottom 0.254: v17.65,11.94 17.65,13.84 14.48,17.02 14.48,20.19 v15.11,20.83
BTN1  (via drill 0.51)
  Top 0.254: JP6.1 40.39,11.3 v41.02,11.94 | v38.48,20.83 38.48,21.46 37.85,22.1 U2.12
  Bottom 0.254: v41.02,11.94 41.02,13.84 37.85,17.02 37.85,20.19 v38.48,20.83
BTN2  (via drill 0.51)
  Top 0.254: JP12.1 63.75,11.3 v64.39,11.94 | v61.85,20.83 61.85,21.46 61.21,22.1 U3.12
  Bottom 0.254: v64.39,11.94 64.39,13.84 61.21,17.02 61.21,20.19 v61.85,20.83
BTN3  (via drill 0.51)
  Top 0.254: JP17.1 87.12,11.3 v87.76,11.94 | v85.22,20.83 85.22,21.46 84.58,22.1 U4.12
  Bottom 0.254: v87.76,11.94 87.76,13.84 84.58,17.02 84.58,20.19 v85.22,20.83
BTN4  (via drill 0.51)
  Top 0.254: JP22.1 110.49,11.3 v111.12,11.94 | v108.58,20.83 108.58,21.46 107.95,22.1 U5.12
  Bottom 0.254: v111.12,11.94 111.12,13.84 107.95,17.02 107.95,20.19 v108.58,20.83
BTN5  (via drill 0.51)
  Top 0.254: JP27.1 133.86,11.3 v134.49,11.94 | v131.95,20.83 131.95,21.46 131.32,22.1 U6.12
  Bottom 0.254: v134.49,11.94 134.49,13.84 131.32,17.02 131.32,20.19 v131.95,20.83
BTN6  (via drill 0.51)
  Top 0.254: JP32.1 17.02,54.99 v17.65,55.63 | v15.11,64.52 15.11,65.15 14.48,65.79 U7.12
  Bottom 0.254: v17.65,55.63 17.65,57.53 14.48,60.71 14.48,63.88 v15.11,64.52
BTN7  (via drill 0.51)
  Top 0.254: JP37.1 40.39,54.99 v41.02,55.63 | v38.48,64.52 38.48,65.15 37.85,65.79 U8.12
  Bottom 0.254: v41.02,55.63 41.02,57.53 37.85,60.71 37.85,63.88 v38.48,64.52
BTN8  (via drill 0.51)
  Top 0.254: JP42.1 63.75,54.99 v64.39,55.63 | v61.85,64.52 61.85,65.15 61.21,65.79 U9.12
  Bottom 0.254: v64.39,55.63 64.39,57.53 61.21,60.71 61.21,63.88 v61.85,64.52
BTN9  (via drill 0.51)
  Top 0.254: JP47.1 87.12,54.99 v87.76,55.63 | v85.22,64.52 85.22,65.15 84.58,65.79 U10.12
  Bottom 0.254: v87.76,55.63 87.76,57.53 84.58,60.71 84.58,63.88 v85.22,64.52
BTN10  (via drill 0.51)
  Top 0.254: JP52.1 110.49,54.99 v111.12,55.63 | v108.58,64.52 108.58,65.15 107.95,65.79 U11.12
  Bottom 0.254: v111.12,55.63 111.12,57.53 107.95,60.71 107.95,63.88 v108.58,64.52
BTN11  (via drill 0.51)
  Top 0.254: JP57.1 133.86,54.99 v134.49,55.63 | v131.95,64.52 131.95,65.15 131.32,65.79 U12.12
  Bottom 0.254: v134.49,55.63 134.49,57.53 131.32,60.71 131.32,63.88 v131.95,64.52
BTN12  (via drill 0.51)
  Top 0.254: JP62.1 17.02,98.68 v17.65,99.31 | v15.11,108.2 15.11,108.84 14.48,109.47 U13.12
  Bottom 0.254: v17.65,99.31 17.65,101.22 14.48,104.39 14.48,107.57 v15.11,108.2
BTN13  (via drill 0.51)
  Top 0.254: JP67.1 40.39,98.68 v41.02,99.31 | v38.48,108.2 38.48,108.84 37.85,109.47 U14.12
  Bottom 0.254: v41.02,99.31 41.02,101.22 37.85,104.39 37.85,107.57 v38.48,108.2
BTN14  (via drill 0.51)
  Top 0.254: JP72.1 63.75,98.68 v64.39,99.31 | v61.85,108.2 61.85,108.84 61.21,109.47 U15.12
  Bottom 0.254: v64.39,99.31 64.39,101.22 61.21,104.39 61.21,107.57 v61.85,108.2
BTN15  (via drill 0.51)
  Top 0.254: JP77.1 87.12,98.68 v87.76,99.31 | v85.22,108.2 85.22,108.84 84.58,109.47 U16.12
  Bottom 0.254: v87.76,99.31 87.76,101.22 84.58,104.39 84.58,107.57 v85.22,108.2
BTN16  (via drill 0.51)
  Top 0.254: JP82.1 110.49,98.68 v111.12,99.31 | v108.58,108.2 108.58,108.84 107.95,109.47 U17.12
  Bottom 0.254: v111.12,99.31 111.12,101.22 107.95,104.39 107.95,107.57 v108.58,108.2